# Altium PCB 2012_BALISE_CARTE_RECEPTEUR.PCBDOC
Units mm, origin at the board's own origin, x right, y up, seen from the top; angles counter-clockwise.
Board outline 60 x 60 mm, 4 copper layers (1-TOP, 2-Signal, 3-GND, 4-BOT); 112 components, 93 nets, 363 pads, 113 vias.
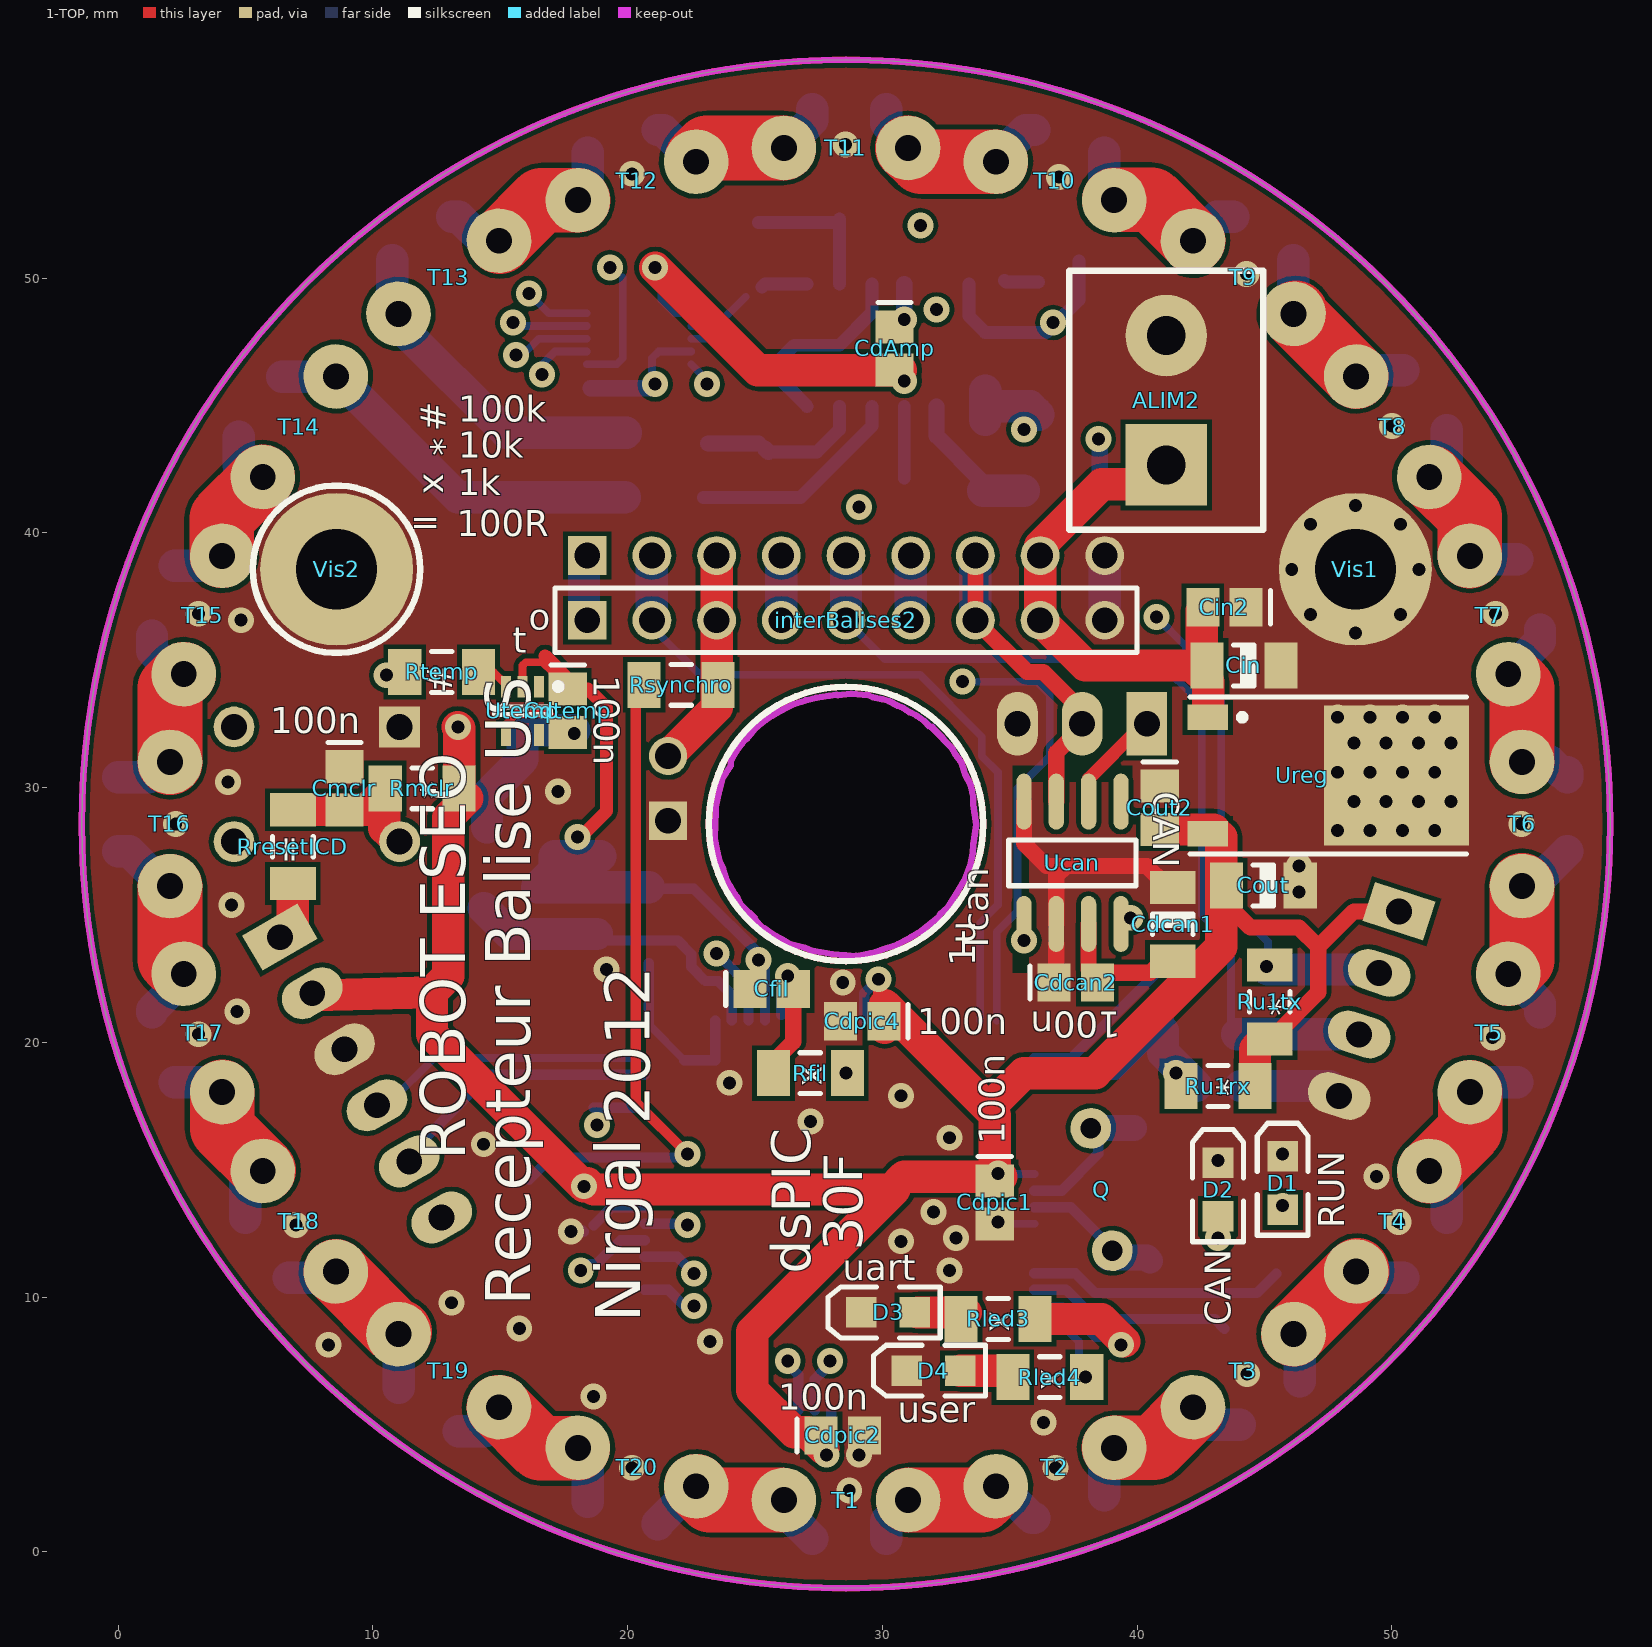
[diagram p0: 1-TOP view]
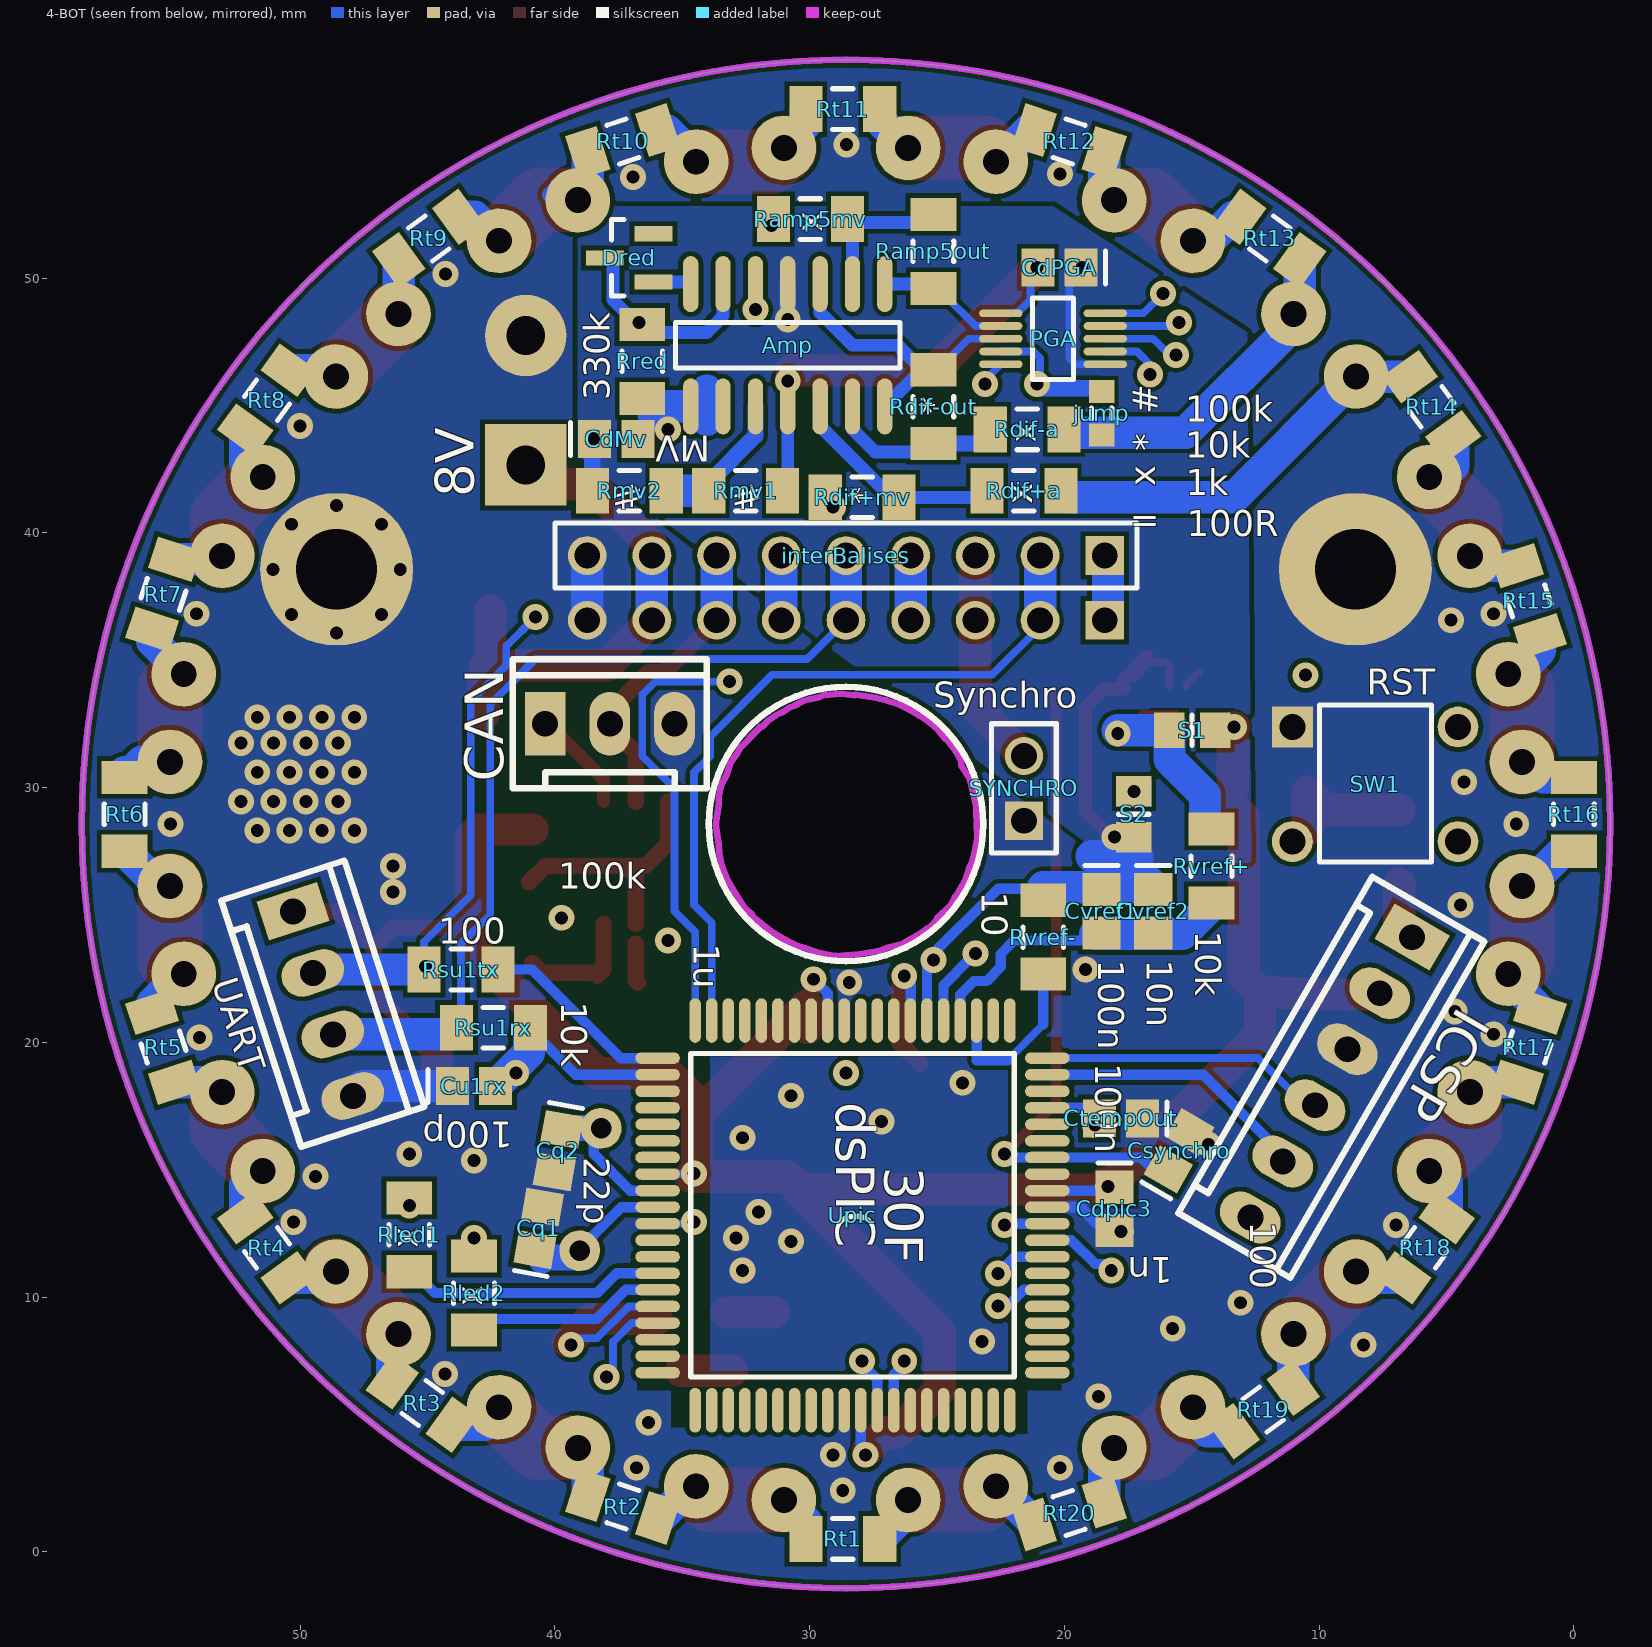
[diagram p1: 4-BOT view, seen from below]
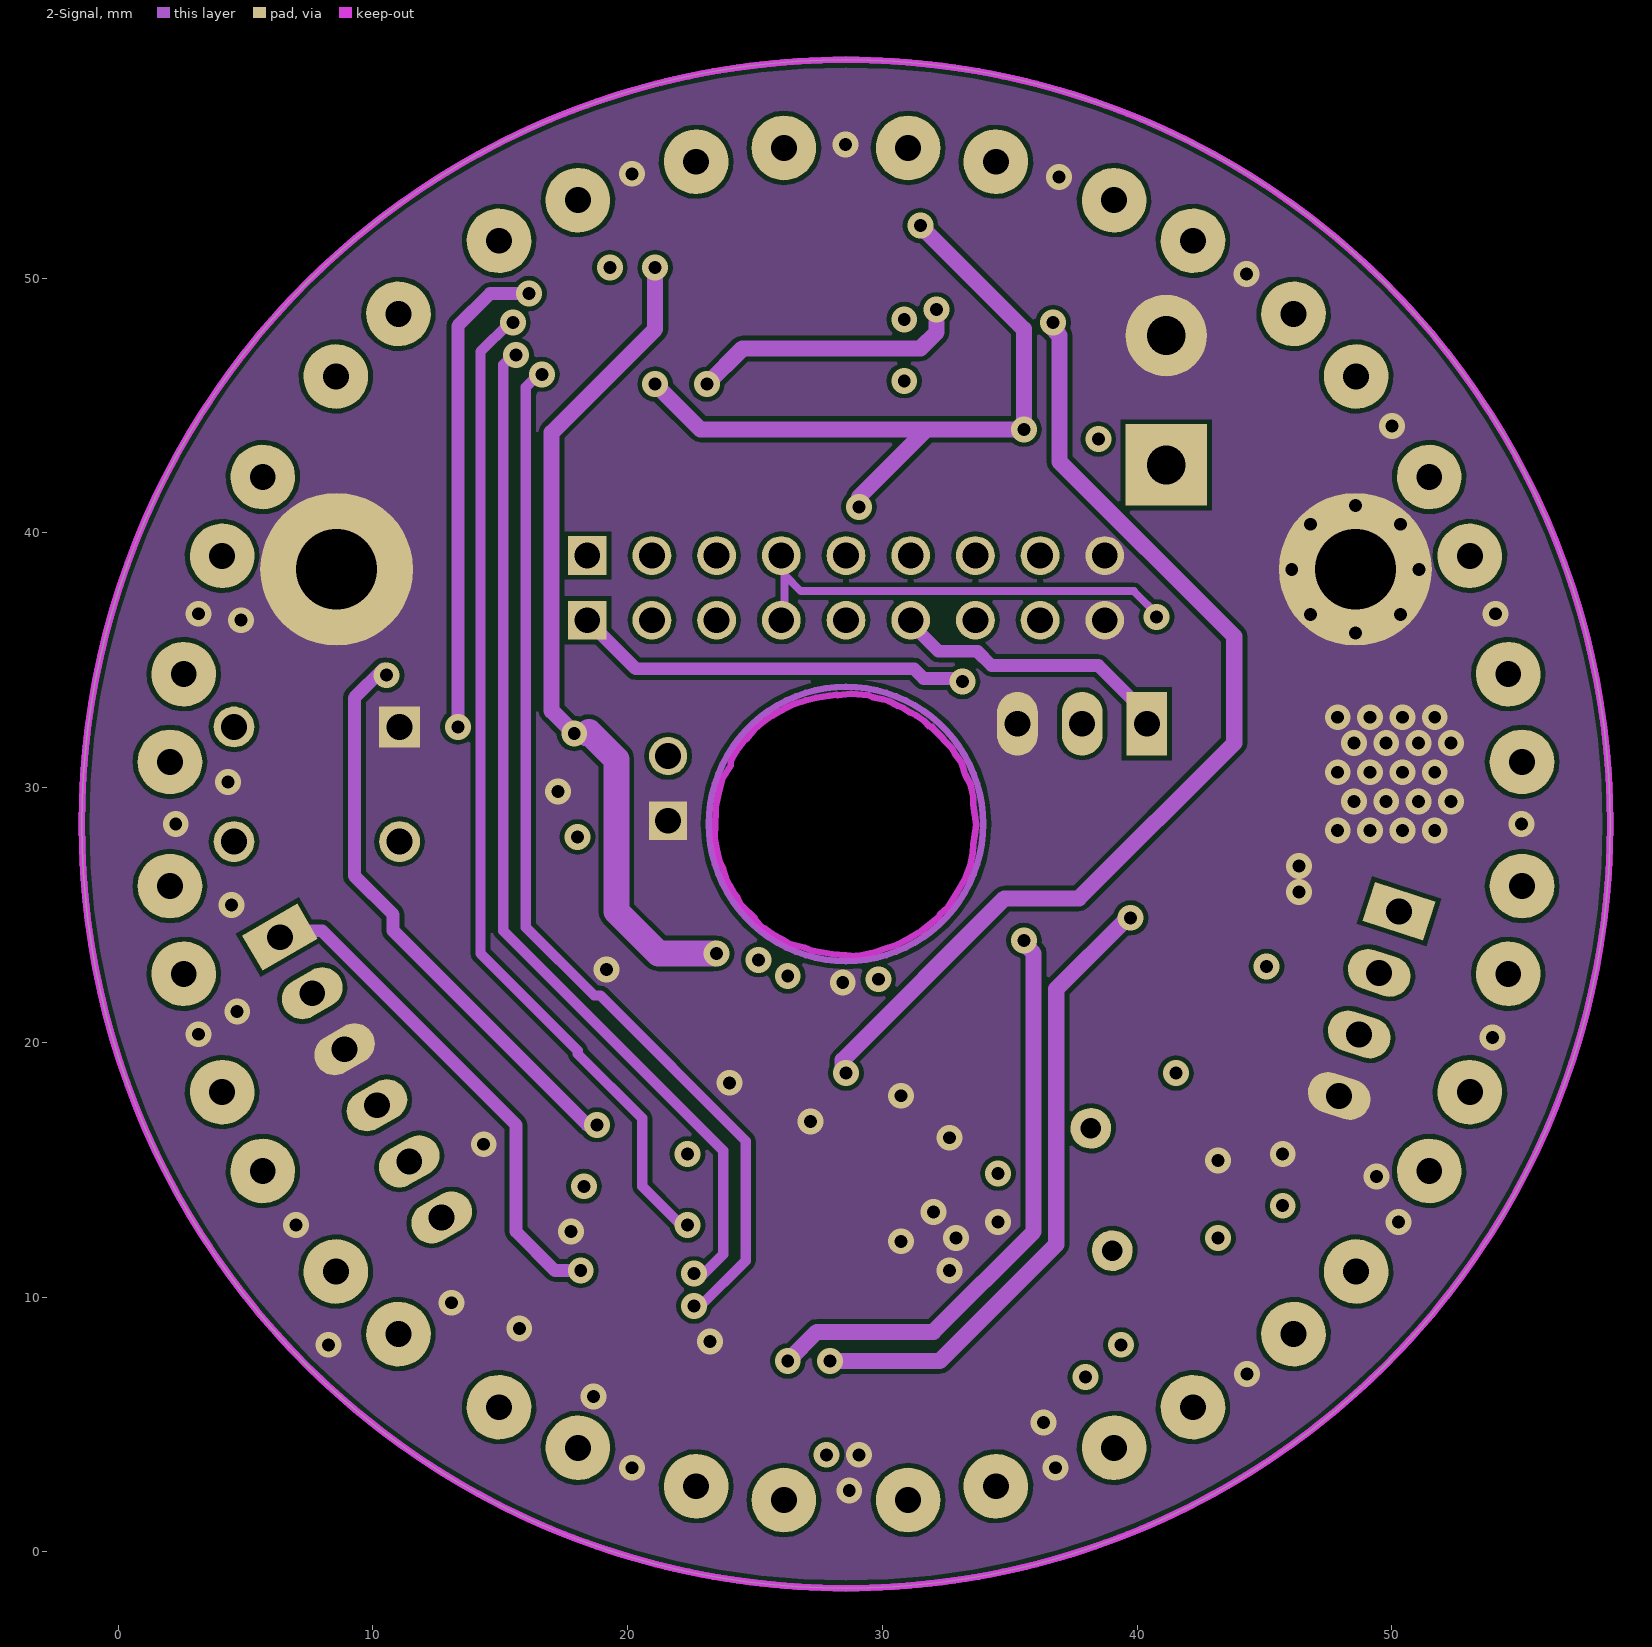
[diagram p2: 2-Signal]
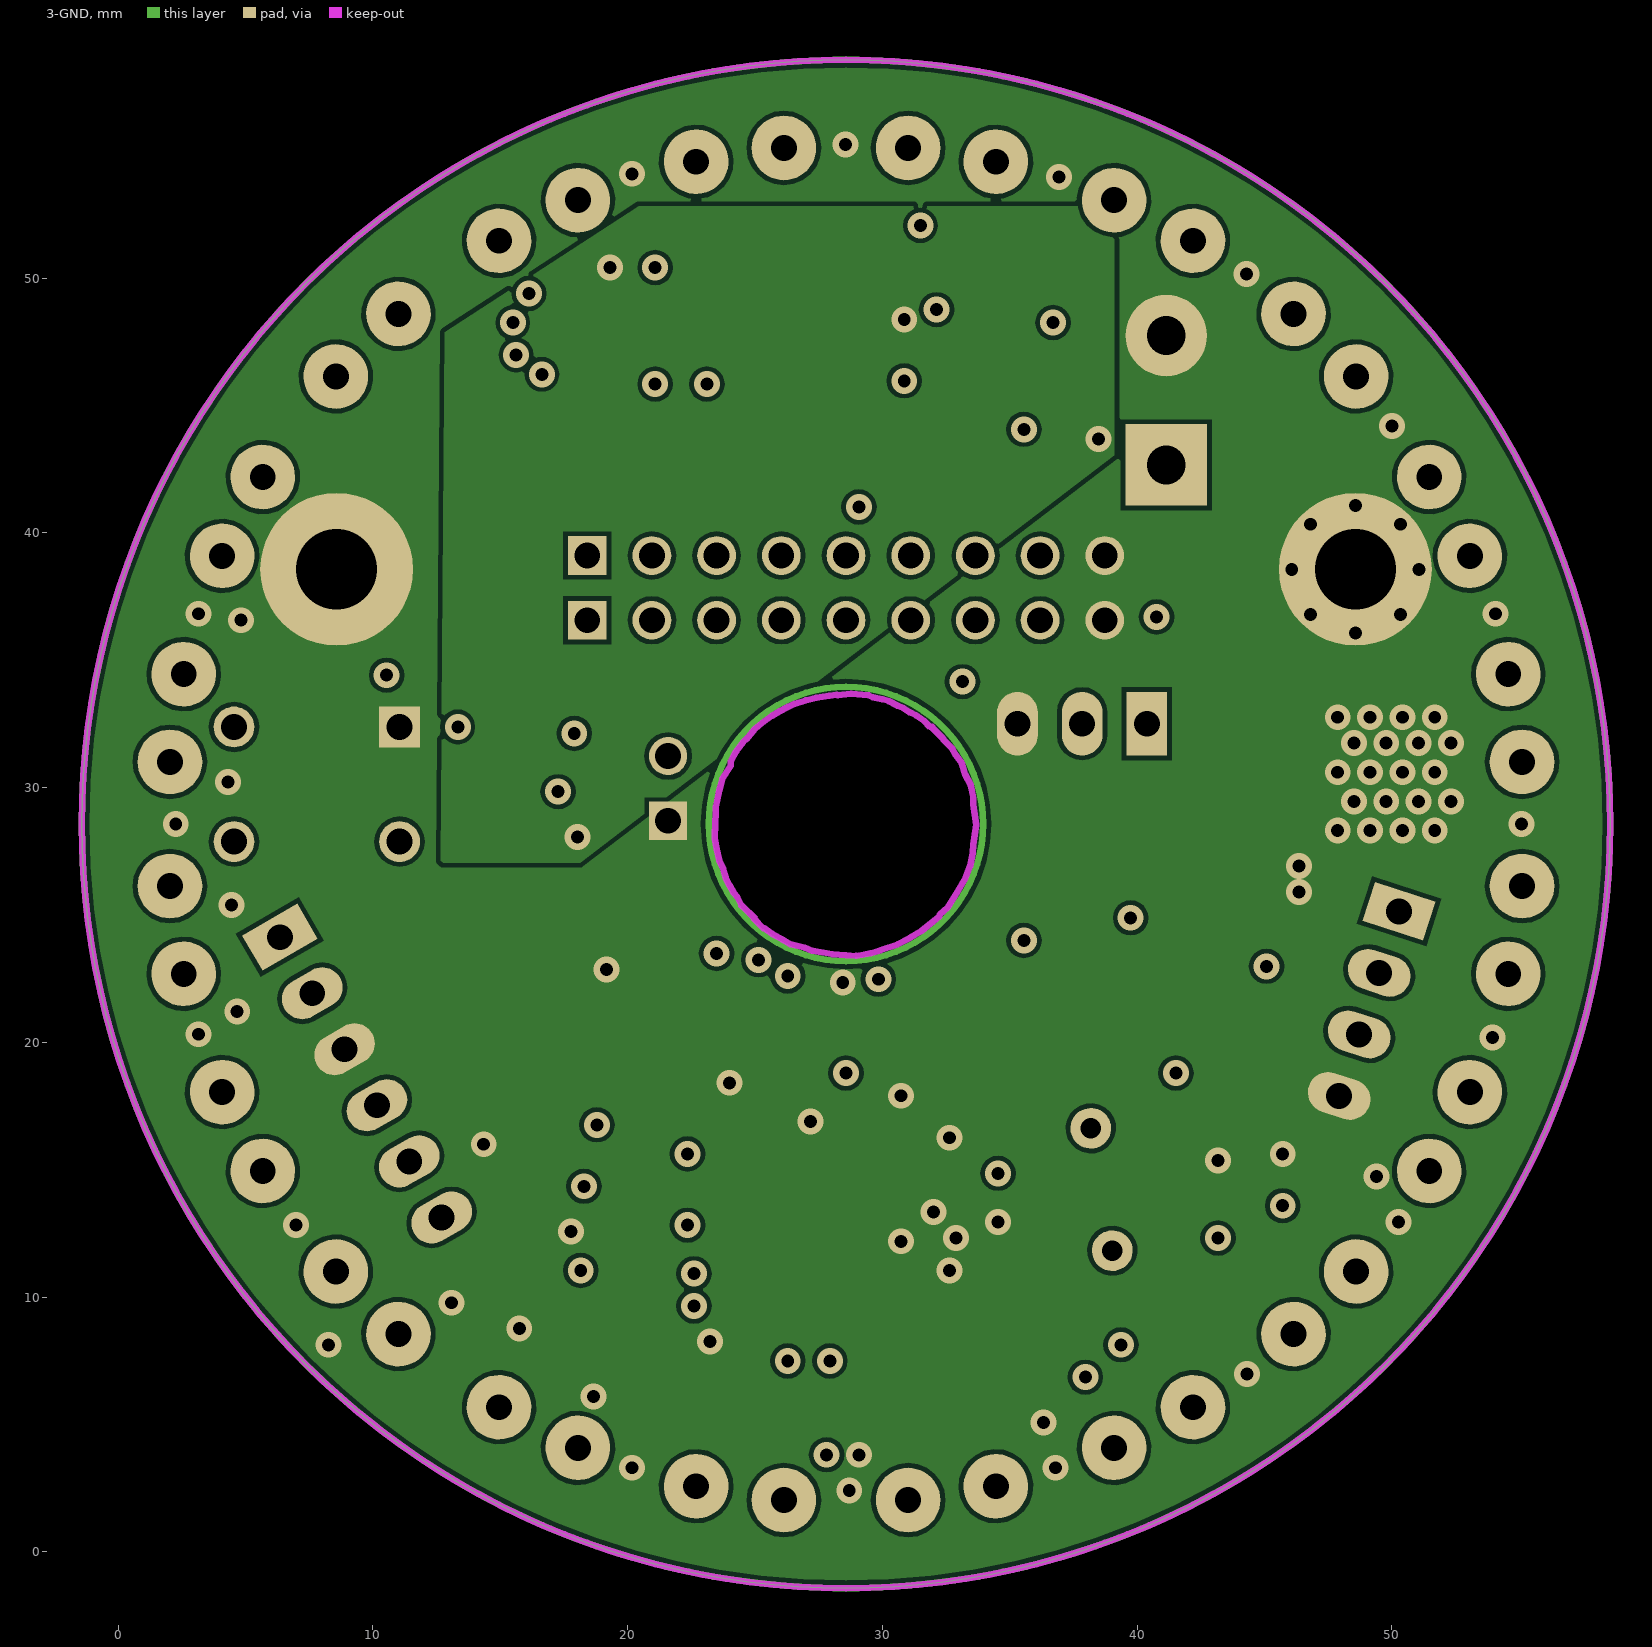
[diagram p3: 3-GND]
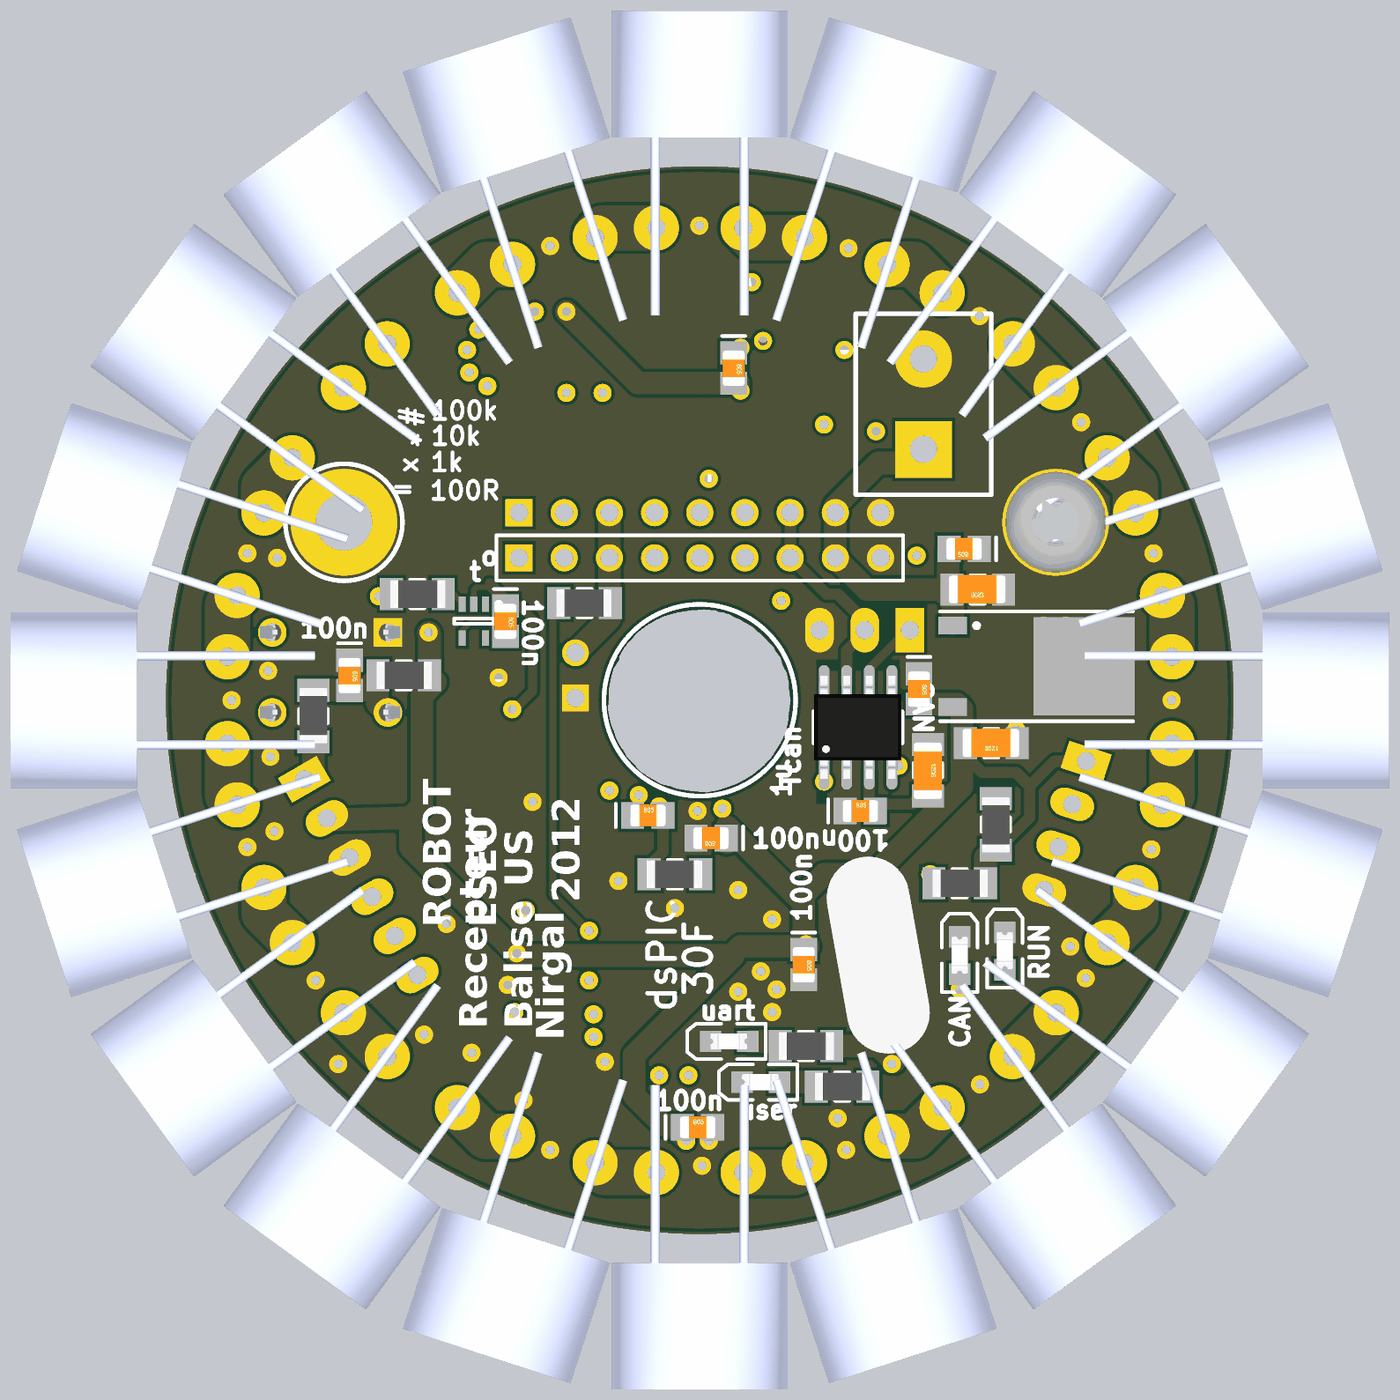
[diagram p4: 3D render of the assembled board from above, using the file's embedded part models]
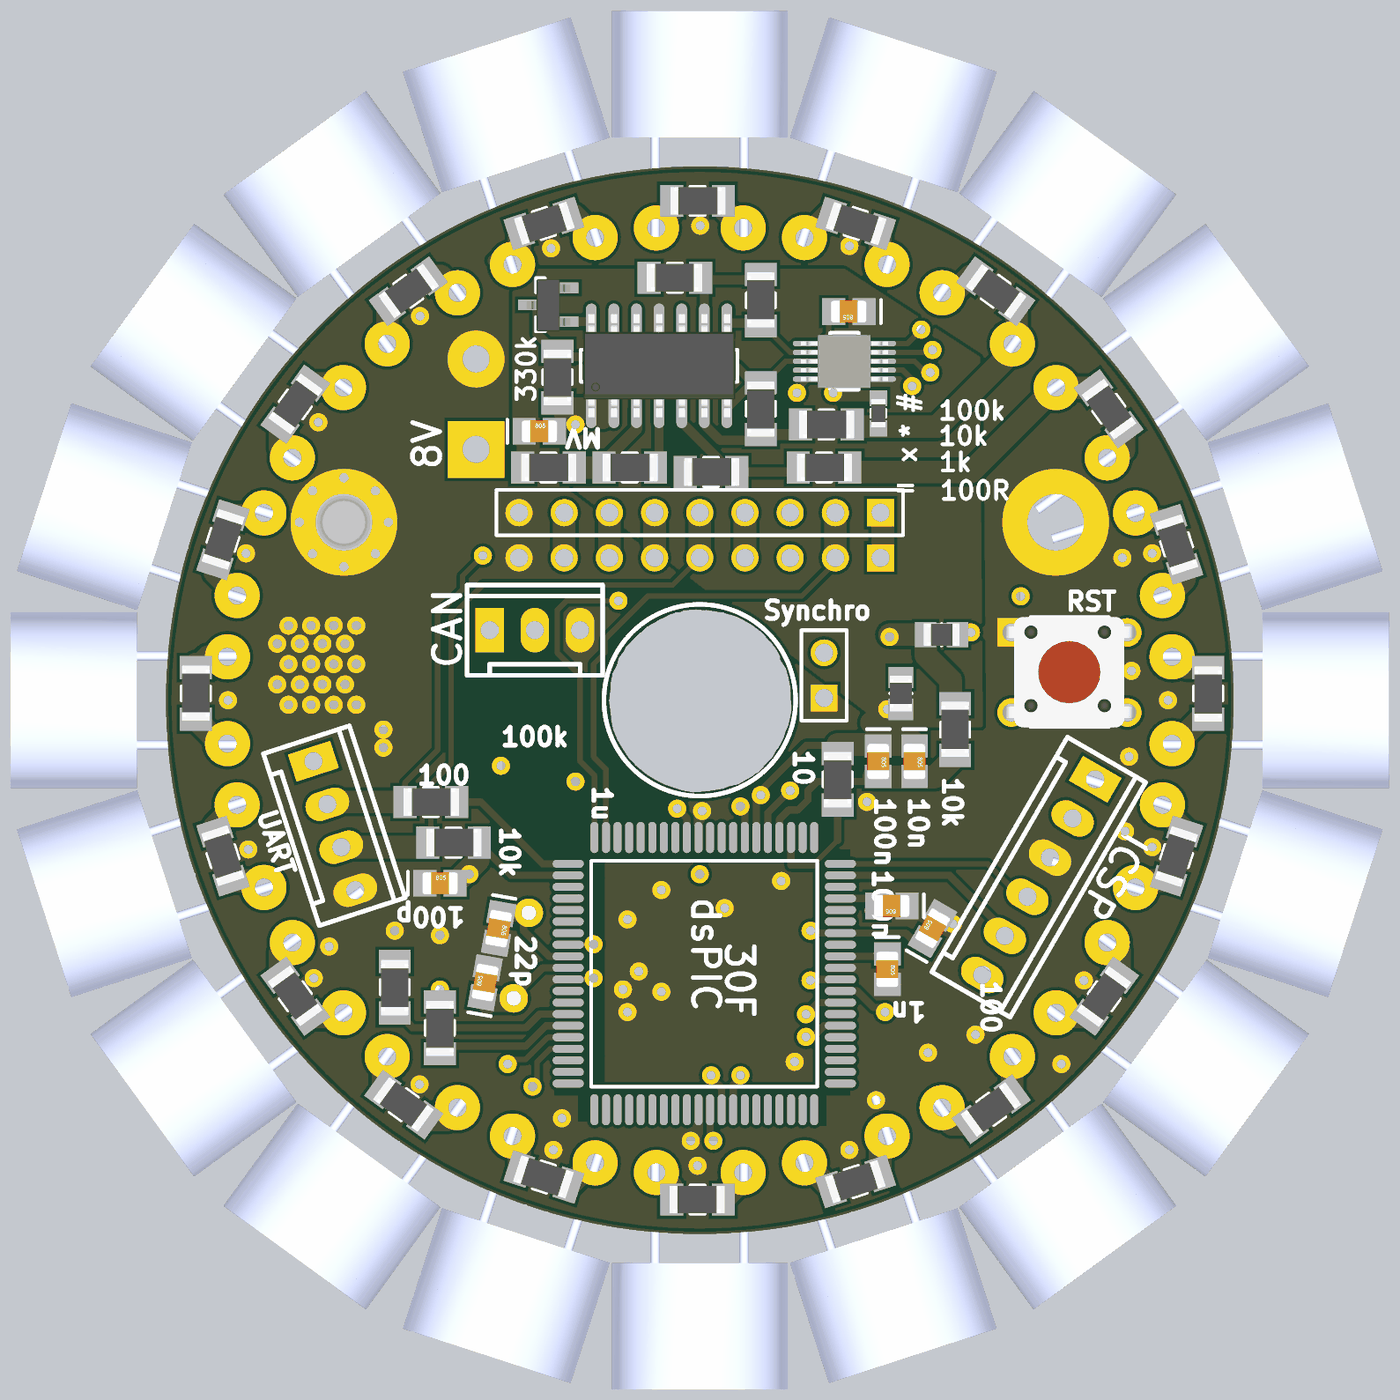
[diagram p5: 3D render of the assembled board from below, using the file's embedded part models]

## Layer stack, top to bottom
1-TOP: signal copper 0.0356
Dielectric: core 0.32, FR-4, Dk 4.8
2-Signal: signal copper 0.0356
Dielectric: prepreg 0.32, FR-4, Dk 4.8
3-GND: signal copper 0.0356
Dielectric: core 0.32, FR-4, Dk 4.8
4-BOT: signal copper 0.0356

## Board outline
-1.425,28.575 ccw(c28.575,28.575) 28.575,-1.425 ccw(c28.575,28.575) 58.575,28.575 ccw(c28.575,28.575) 28.575,58.575 ccw(c28.575,28.575)
cut-out: 24.257,31.42 24.054,31.039 24.054,30.861 23.724,30.353 23.597,29.896 23.47,29.261 23.444,28.346 23.419,28.321 23.419,27.991 23.495,27.584 23.597,27.153 23.749,26.822 23.851,26.467 24.003,26.162 24.181,25.857 24.308,25.705 24.46,25.4 24.46,25.375 24.486,25.375 25.019,24.841 24.968,24.841 25.324,24.486 25.375,24.486 25.679,24.257 26.06,24.054 26.391,23.851 26.949,23.724 27.254,23.597 28.042,23.47 28.575,23.419 28.981,23.393 29.54,23.495 29.947,23.622 30.607,23.851 31.09,24.105 31.547,24.384 32.233,24.943 32.258,25.019 32.563,25.298 32.969,25.933 33.223,26.365 33.452,26.924 33.553,27.432 33.579,27.762 33.68,28.55 33.579,29.337 33.579,29.591 33.477,30.099 33.249,30.531 33.122,30.963 32.842,31.344 32.741,31.547 32.385,31.902 32.385,31.928 31.953,32.36 31.953,32.385 31.877,32.385 31.623,32.639 31.318,32.842 31.064,32.969 30.836,33.122 30.582,33.223 30.251,33.401 29.997,33.477 29.616,33.553 29.464,33.63 28.778,33.68 28.245,33.63 28.219,33.655 27.915,33.604 27.407,33.528 27,33.426 26.568,33.299 26.289,33.172 25.959,32.995 25.654,32.817 25.273,32.537 24.994,32.309 24.663,31.902 24.638,31.902 24.536,31.801

## Design rules (kind name [scope] priority, off if disabled: settings)
Clearance [All] p1: gap=0.178
FabricationTestPointUsage TestPointUsage [All] p1: valid=0 allowmultiple=FALSE
FabricationTestpoint Testpoint [(IsPad And (OnTopLayer Or OnBottomLayer))] p1: side=3 testpointundercomponent=TRUE minsize=1.016 maxsize=2.54 preferedsize=1.524 minholesize=0 maxholesize=1.016 preferedholesize=0.813 testpointgrid=0.025 allowsidetop=TRUE allowsidebottom=TRUE usegrid=TRUE gridtolerance=0
PlaneConnect [All] p1: planeconnectstyle=Direct reliefexpansion=0.635 reliefentries=4 reliefconductorwidth=0.305 reliefairgap=0.381
PolygonConnect [All] p1: connectstyle=Direct reliefconductorwidth=0.254 reliefentries=4 polygonreliefangle="90 Angle"
RoomDefinition 2012_BALISE_CARTE_RECEPTEUR [InComponentClass('2012_BALISE_CARTE_RECEPTEUR')] p1: confinementstyle=ConfineIn formatcopy=TRUE lockcomponents=FALSE outline 59.731,0 66.843,0 66.843,9.652 59.731,9.652
RoutingLayers RoutingLayers_1 [All] p1: top layer_v5=TRUE mid layer 1_v5=FALSE mid layer 2_v5=FALSE bottom layer_v5=TRUE
RoutingLayers [All] p2: top layer_v5=TRUE mid layer 1_v5=FALSE mid layer 2_v5=FALSE bottom layer_v5=TRUE
RoutingVias [All] p1: holewidth=0.61 width=1.27 viastyle="Through Hole" minholewidth=0.61 minwidth=1.27 maxholewidth=0.61 maxwidth=1.27
SilkscreenOverComponentPads [All] p1: minsilkscreentomaskgap=0.254
SolderMaskExpansion [All] p1: expansion=0
Width ALIM [InNet('0') Or InNet('VDD')] p1: maxlimit=2.54 minlimit=0.254 preferedwidth=0.635
Width [All] p2: maxlimit=3.81 minlimit=0.127 preferedwidth=0.406
23 further rules are at their usual default settings.

## Components (designator, comment, footprint, x,y, rotation, side; value= is the part's Value field where it differs from the comment)
ALIM2 "ALIM2" BORNIER2 41.148,42.672 r90 top
Amp "MCP6024-I/SL" SO14_N 30.861,47.371 r90 bottom
CAN "BARRETTE3" HE14_3 40.386,32.512 r180 bottom
CdAmp "100nF" C0805_N 30.48,47.244 r270 top
Cdcan1 "1uF" C1206_N 41.402,24.638 r270 top
Cdcan2 "100nF" C0805_N 37.592,22.352 r0 top
CdMv "100nF" C0805_N 37.592,43.688 r180 bottom
CdPGA "100nF" C0805_N 20.193,50.419 r0 bottom
Cdpic1 "100nF" C0805_N 34.417,13.716 r270 top
Cdpic2 "100nF" C0805_N 28.448,4.572 r0 top
Cdpic3 "100nF" C0805_N 18.034,13.462 r270 bottom
Cdpic4 "100nF" C0805_N 29.21,20.828 r180 top
Cdtemp "100nF" C0805_N 17.653,33.02 r270 top
Cfil "1nF" C0805_N 25.654,22.098 r0 top
Cin "10uF" C1206_N 44.196,34.798 r180 top
Cin2 "10nF" C0805_N 43.434,37.084 r180 top
Cmclr "100nF" C0805_N 8.89,29.972 r270 top
Cout "10uF" C1206_N 44.958,26.162 r180 top
Cout2 "100nF" C0805_N 40.894,29.21 r270 top
Cq1 "22pF" C0805_N 40.64,12.7 r100 bottom
Cq2 "22pF" C0805_N 39.878,15.748 r280 bottom
Csynchro "1nF" C0805_N 15.494,15.748 r120 bottom
CtempOut "1uF" C0805_N 17.78,17.018 r0 bottom
Cu1rx "100pF" C0805_N 43.18,18.288 r180 bottom
Cvref1 "100nF" C0805_N 18.542,25.146 r270 bottom
Cvref2 "10nF" C0805_N 16.51,25.146 r270 bottom
D1 "LED" LED_0805 45.72,14.478 r90 top
D2 "LED" LED_0805 43.18,14.224 r90 top
D3 "LED" LED_0805 30.226,9.398 r180 top
D4 "LED" LED_0805 32.004,7.112 r180 top
Dred "Diode Shottky BAT54" SOT23-3N 37.084,50.8 r0 bottom
ICSP "BARRETTE6" HE14_6 6.35,24.13 r300 bottom
interBalises "Header 9" HDR1X9 18.415,39.116 r0 bottom locked
interBalises2 "Header 9" HDR1X9 18.415,36.576 r0 top locked
jump "0R" R0603_N 18.542,44.704 r270 bottom
PGA "PGA113" MSOP-UN10_N 20.447,47.625 r180 bottom
Q "QU" HC49US 38.608,14.224 r280 top
Ramp5mv "1k" R1206_N 29.972,52.324 r0 bottom
Ramp5out "4.7k" R1206_N 25.146,51.054 r90 bottom
Rdif+a "1k" R1206_N 21.59,41.656 r180 bottom
Rdif+mv "10k" R1206_N 27.94,41.402 r180 bottom
Rdif-a "1k" R1206_N 21.463,44.069 r180 bottom
Rdif-out "10k" R1206_N 25.146,44.958 r270 bottom
Rfil "1k" R1206_N 27.178,18.796 r180 top
Rled1 "1K" R1206_N 45.72,12.446 r270 bottom
Rled2 "1K" R1206_N 43.18,10.16 r270 bottom
Rled3 "1K" R1206_N 34.544,9.144 r0 top
Rled4 "1K" R1206_N 36.576,6.858 r0 top
Rmclr "10k" R1206_N 11.938,29.972 r0 top
Rmv1 "100k" R1206_N 32.512,41.656 r180 bottom
Rmv2 "100k" R1206_N 37.084,41.656 r180 bottom
Rred "330k" R1206_N 36.576,46.736 r270 bottom
RresetICD "100" R1206_N 6.858,27.686 r90 top
Rsu1rx "10k" R1206_N 42.418,20.574 r180 bottom
Rsu1tx "100" R1206_N 43.688,22.86 r180 bottom
Rsynchro "100" R1206_N 22.098,34.036 r180 top
Rt1 "4.7k" R1206_N 28.702,0.508 r0 bottom
Rt2 "4.7k" R1206_N 37.338,1.778 r18 bottom
Rt3 "4.7k" R1206_N 45.212,5.842 r36 bottom
Rt4 "4.7k" R1206_N 51.308,11.938 r54 bottom
Rt5 "4.7k" R1206_N 55.372,19.812 r72 bottom
Rt6 "4.7k" R1206_N 56.896,28.956 r90 bottom
Rt7 "4.7k" R1206_N 55.372,37.592 r108 bottom
Rt8 "4.7k" R1206_N 51.308,45.212 r126 bottom
Rt9 "4.7k" R1206_N 44.958,51.562 r144 bottom
Rt10 "4.7k" R1206_N 37.338,55.372 r162 bottom
Rt11 "4.7k" R1206_N 28.702,56.642 r180 bottom
Rt12 "4.7k" R1206_N 19.812,55.372 r198 bottom
Rt13 "4.7k" R1206_N 11.938,51.562 r216 bottom
Rt14 "4.7k" R1206_N 5.588,44.958 r234 bottom
Rt15 "4.7k" R1206_N 1.778,37.338 r252 bottom
Rt16 "4.7k" R1206_N 0,28.956 r270 bottom
Rt17 "4.7k" R1206_N 1.778,19.812 r288 bottom
Rt18 "4.7k" R1206_N 5.842,11.938 r306 bottom
Rt19 "4.7k" R1206_N 12.192,5.588 r324 bottom
Rt20 "4.7k" R1206_N 19.812,1.524 r342 bottom
Rtemp "100k" R1206_N 12.7,34.544 r0 top
Ru1rx "10k" R1206_N 43.18,18.288 r0 top
Ru1tx "10k" R1206_N 45.212,21.59 r270 top
Rvref+ "10k" R1206_N 14.224,26.924 r90 bottom
Rvref- "10" R1206_N 20.828,24.13 r270 bottom
S1 "Strap" R0805_N 14.986,32.258 r0 bottom
S2 "Strap" R0805_N 17.272,28.956 r270 bottom
SW1 "SW_Pushbutton_6x6mm_Vertical" "Switch 6x6 Vertical" 11.049,32.385 r180 bottom
SYNCHRO "SYNCHRO" HEADER2 21.59,28.702 r90 bottom
T1 "40kHz" "MA40S4R/S Transducteur US - 3D_mi_carte" 28.575,2.032 r180 top locked
T2 "40kHz" "MA40S4R/S Transducteur US - 3D_mi_carte" 36.779,3.327 r198 top locked
T3 "40kHz" "MA40S4R/S Transducteur US - 3D_mi_carte" 44.171,7.112 r216 top locked
T4 "40kHz" "MA40S4R/S Transducteur US - 3D_mi_carte" 50.038,12.979 r234 top locked
T5 "40kHz" "MA40S4R/S Transducteur US - 3D_mi_carte" 53.823,20.371 r252 top locked
T6 "40kHz" "MA40S4R/S Transducteur US - 3D_mi_carte" 55.118,28.575 r270 top locked
T7 "40kHz" "MA40S4R/S Transducteur US - 3D_mi_carte" 53.823,36.779 r288 top locked
T8 "40kHz" "MA40S4R/S Transducteur US - 3D_mi_carte" 50.038,44.171 r306 top locked
T9 "40kHz" "MA40S4R/S Transducteur US - 3D_mi_carte" 44.171,50.038 r324 top locked
T10 "40kHz" "MA40S4R/S Transducteur US - 3D_mi_carte" 36.779,53.823 r342 top locked
T11 "40kHz" "MA40S4R/S Transducteur US - 3D_mi_carte" 28.575,55.118 r0 top locked
T12 "40kHz" "MA40S4R/S Transducteur US - 3D_mi_carte" 20.371,53.823 r18 top locked
T13 "40kHz" "MA40S4R/S Transducteur US - 3D_mi_carte" 12.979,50.038 r36 top locked
T14 "40kHz" "MA40S4R/S Transducteur US - 3D_mi_carte" 7.112,44.171 r54 top locked
T15 "40kHz" "MA40S4R/S Transducteur US - 3D_mi_carte" 3.327,36.779 r72 top locked
T16 "40kHz" "MA40S4R/S Transducteur US - 3D_mi_carte" 2.032,28.575 r90 top locked
T17 "40kHz" "MA40S4R/S Transducteur US - 3D_mi_carte" 3.327,20.371 r108 top locked
T18 "40kHz" "MA40S4R/S Transducteur US - 3D_mi_carte" 7.112,12.979 r126 top locked
T19 "40kHz" "MA40S4R/S Transducteur US - 3D_mi_carte" 12.979,7.112 r144 top locked
T20 "40kHz" "MA40S4R/S Transducteur US - 3D_mi_carte" 20.371,3.327 r162 top locked
UART "BARRETTE4" HE14_4 50.292,25.146 r252 bottom
Ucan "MCP2551" SO8_N 37.465,27.051 r90 top
Upic "dsPIC30F6010A" TQFP80_N 28.321,13.208 r0 bottom locked
Ureg "MC7805BDTG" 369A-13 46.482,30.48 r270 top
Utemp "MCP9701AT-E/LT" SC70-LT5_N 15.875,33.02 r270 top
Vis1 "Pad_M3" M3x6mm#1 48.575,38.575 r0 top
Vis2 "Pad_M3" M3x6mm#2 8.575,38.575 r0 top

## Footprints (in the part's own frame and the unit in brackets; to place one, negate y for a bottom-side part, rotate by r counter-clockwise, add the part's x,y. Pads: shape width x height; smd on the part's side, far side on the other; paste and mask are expansions set on the pad)
369A-13 [mm] "D-PAK/TO-252-AA; 3 Leads (1 Cropped); Body 10.3 (inc. leads) x 6.7 mm (LxW max)"
  rect 1x1.6 smd: 1(-2.285,-3.7) 3(2.285,-3.7)
  rect 5.5x5.7 smd: 4(0,3.7)
  silkscreen extent -3.09,-4.4 3.09,6.45
BORNIER2 [mm] "Connector; Header; 2 Position; screw terminal blocks, Pin Spacing=5.08mm"
  rect 3.2x3.2 hole 1.524: 1(0,0)
  round 3.2 hole 1.524: 2(5.08,0)
  silkscreen extent -2.54,-3.81 7.62,3.81
C0805_N [mm] "Chip Capacitor, Body 2.0x1.3mm, IPC Medium Density"
  rect 1.3x1.5 smd: 1(-0.85,0) 2(0.85,0)
  silkscreen extent -1.8,-0.65 -1.8,0.65, body extent -0.99,-0.63 1.01,0.63, height 0.8
C1206_N [mm] "Chip Capacitor, Body 3.2x1.6mm, IPC Medium Density"
  rect 1.3x1.8 smd: 1(-1.45,0) 2(1.45,0)
  silkscreen extent -0.4,-0.8 0.4,0.8, body extent -1.57,-0.81 1.63,0.79, height 1.02
HC49US [mil] "Quartz Crystal, HC49 Bas profil, Pas 4,88mm"
  round 63 hole 32: 1(-96.06,0) 2(96.06,0)
  body extent -236,-150 233,150, height 143
HDR1X9 [mil] "Connector; Header; 9 Position"
  rect 60x60 hole 40: 1(0,0)
  round 60 hole 40: 2(100,0) 3(200,0) 4(300,0) 5(400,0) 6(500,0) 7(600,0) 8(700,0) 9(800,0)
  silkscreen extent -50,-50 850,50
HE14_3 [mm] "Connector; HE14; 3 Position; Pin Spacing=2.54mm"
  rect 1.6x2.5 hole 1.016: 1(0,0)
  oval 1.6x2.5 hole 1.016: 2(2.54,0) 3(5.08,0)
  silkscreen extent -1.27,-2.54 6.35,2.54
HE14_4 [mm] "Connector; HE14; 4 Position; Pin Spacing=2.54mm"
  rect 1.6x2.5 hole 1.016: 1(0,0)
  oval 1.6x2.5 hole 1.016: 2(2.54,0) 3(5.08,0) 4(7.62,0)
  silkscreen extent -1.27,-2.54 8.89,2.54
HE14_6 [mm] "Connector; HE14; 6 Position; Pin Spacing=2.54mm"
  rect 1.6x2.5 hole 1.016: 1(0,0)
  oval 1.6x2.5 hole 1.016: 2(2.54,0) 3(5.08,0) 4(7.62,0) 5(10.16,0) 6(12.7,0)
  silkscreen extent -1.27,-2.54 13.97,2.54
HEADER2 [mm] "Connector; Header; 2 Position"
  rect 1.5x1.5 hole 1.016: 1(0,0)
  round 1.5 hole 1.016: 2(2.54,0)
  silkscreen extent -1.27,-1.27 3.81,1.27
LED_0805 [mm] "SM LED; 2 Flat Leads"
  rect 1.2x1.2 smd: 1(-1.05,0) 2(1.05,0)
  silkscreen extent -2.05,-1 2.35,1, body extent -1.05,-0.64 1.06,0.64, height 1.2
M3x6mm#1 [mm] "Vis M3 X 6mm _TORX_Tête 6mm"
  round 0.8 hole 0.508: 1(-2.5,0) 1(-1.768,-1.768) 1(-1.768,1.768) 1(0,-2.5) 1(0,2.5) 1(1.768,-1.768) 1(1.768,1.768) 1(2.5,0)
  round 6 hole 3.175: 1(0,0)
  body extent -2.84,-2.85 2.86,2.85, height 1.67
M3x6mm#2 [mm] "Vis M3 X 6mm"
  round 6 hole 3.175: 1(0,0)
  silkscreen extent -3.29,-3.28 3.29,3.28
"MA40S4R/S Transducteur US - 3D_mi_carte" [mm]
  round 2.54 hole 1.016: 1(-2.44,0) 2(2.44,0)
  body extent -4.95,-4.91 4.95,12.19, height 5.36
MSOP-UN10_N [mm] "TSSOP, 10-Leads, Body 3x3mm, Pitch 0.5mm, IPC Medium Density"
  oval 1.7x0.3 smd: 1(-2.05,1) 2(-2.05,0.5) 3(-2.05,0) 4(-2.05,-0.5) 5(-2.05,-1) 6(2.05,-1) 7(2.05,-0.5) 8(2.05,0) 9(2.05,0.5) 10(2.05,1)
  silkscreen extent -0.8,-1.6 0.8,1.6, body extent -2.45,-1.5 2.45,1.5, height 1.01
R0603_N [mm] "Chip Resistor, Body 1.6x0.8mm, IPC Medium Density"
  rect 0.9x1 smd: 1(-0.85,0) 2(0.85,0)
  silkscreen extent -0.2,-0.4 0.2,0.4, body extent -0.85,-0.48 0.85,0.48, height 0.6
R0805_N [mm] "Chip Resistor, Body 2.0x1.3mm, IPC Medium Density"
  rect 1.2x1.4 smd: 1(-0.9,0) 2(0.9,0)
  silkscreen extent 0,-0.6 0,0.6, body extent -1.07,-0.7 1.07,0.7, height 0.65
R1206_N [mm] "Chip Resistor, Body 3.2x1.6mm, IPC Medium Density"
  rect 1.3x1.8 smd: 1(-1.45,0) 2(1.45,0)
  silkscreen extent -0.4,-0.8 0.4,0.8, body extent -1.68,-0.87 1.68,0.87, height 0.71
SC70-LT5_N [mm] "SOT353, 5-Leads, Body 2x1.3mm, Pitch 0.65mm, Lead Span 2.1mm, IPC Medium Density"
  rect 0.85x0.4 smd: 1(-0.95,0.65) 2(-0.95,0) 3(-0.95,-0.65) 4(0.95,-0.65) 5(0.95,0.65)
  silkscreen extent -1.07,-1.1 0.15,1.53, body extent -0.7,-1.1 0.7,1.1, height 1.1
SO8_N [mm] "8-Pin Small Outline Integrated Circuit 1.27 mm Pitch, IPC Medium Density"
  oval 2.2x0.6 smd: 1(-2.4,1.905) 2(-2.4,0.635) 3(-2.4,-0.635) 4(-2.4,-1.905) 5(2.4,-1.905) 6(2.4,-0.635) 7(2.4,0.635) 8(2.4,1.905)
  silkscreen extent -0.9,-2.5 0.9,2.5, body extent -2.89,-2.45 2.89,2.46, height 1.75
SO14_N [mm] "14-Pin Small Outline Integrated Circuit 1.27 mm Pitch, IPC Medium Density"
  oval 2.2x0.6 smd: 1(-2.4,3.81) 2(-2.4,2.54) 3(-2.4,1.27) 4(-2.4,0) 5(-2.4,-1.27) 6(-2.4,-2.54) 7(-2.4,-3.81) 8(2.4,-3.81) 9(2.4,-2.54) 10(2.4,-1.27) 11(2.4,0) 12(2.4,1.27) 13(2.4,2.54) 14(2.4,3.81)
  silkscreen extent -0.9,-4.4 0.9,4.4, body extent -2.9,-4.33 2.9,4.33, height 1.75
SOT23-3N [mm] "SOT23, 3-Leads, Body 2.9x1.3mm, Pitch 0.95mm, Lead Span 2.5mm, IPC Medium Density"
  rect 1.5x0.6 smd: 1(-0.95,0.95) 2(-0.95,-0.95) 3(0.95,0)
  silkscreen extent 0.2,-1.5 0.7,1.5, body extent -1.24,-1.5 1.23,1.5, height 1.1
"Switch 6x6 Vertical" [mm]
  rect 1.6x1.6 hole 1.016: 1(0,0)
  round 1.6 hole 1.016: 2(6.5,0) 3(0,-4.5) 4(6.5,-4.5)
  silkscreen extent 1.07,-5.31 5.46,0.86, body extent -0.71,-5.34 7.19,0.86, height 7
TQFP80_N [mm] "80-Pin Thin Plastic Quad Flat Pack 0.65 mm Pitch, IPC Medium Density"
  oval 1.75x0.45 smd: 1(-7.65,6.175) 2(-7.65,5.525) 3(-7.65,4.875) 4(-7.65,4.225) 5(-7.65,3.575) 6(-7.65,2.925) 7(-7.65,2.275) 8(-7.65,1.625) 9(-7.65,0.975) 10(-7.65,0.325) 11(-7.65,-0.325) 12(-7.65,-0.975) 13(-7.65,-1.625) 14(-7.65,-2.275) 15(-7.65,-2.925) 16(-7.65,-3.575) 17(-7.65,-4.225) 18(-7.65,-4.875) 19(-7.65,-5.525) 20(-7.65,-6.175) 41(7.65,-6.175) 42(7.65,-5.525) 43(7.65,-4.875) 44(7.65,-4.225) 45(7.65,-3.575) 46(7.65,-2.925) 47(7.65,-2.275) 48(7.65,-1.625) 49(7.65,-0.975) 50(7.65,-0.325) 51(7.65,0.325) 52(7.65,0.975) 53(7.65,1.625) 54(7.65,2.275) 55(7.65,2.925) 56(7.65,3.575) 57(7.65,4.225) 58(7.65,4.875) 59(7.65,5.525) 60(7.65,6.175)
  oval 0.45x1.75 smd: 21(-6.175,-7.65) 22(-5.525,-7.65) 23(-4.875,-7.65) 24(-4.225,-7.65) 25(-3.575,-7.65) 26(-2.925,-7.65) 27(-2.275,-7.65) 28(-1.625,-7.65) 29(-0.975,-7.65) 30(-0.325,-7.65) 31(0.325,-7.65) 32(0.975,-7.65) 33(1.625,-7.65) 34(2.275,-7.65) 35(2.925,-7.65) 36(3.575,-7.65) 37(4.225,-7.65) 38(4.875,-7.65) 39(5.525,-7.65) 40(6.175,-7.65) 61(6.175,7.65) 62(5.525,7.65) 63(4.875,7.65) 64(4.225,7.65) 65(3.575,7.65) 66(2.925,7.65) 67(2.275,7.65) 68(1.625,7.65) 69(0.975,7.65) 70(0.325,7.65) 71(-0.325,7.65) 72(-0.975,7.65) 73(-1.625,7.65) 74(-2.275,7.65) 75(-2.925,7.65) 76(-3.575,7.65) 77(-4.225,7.65) 78(-4.875,7.65) 79(-5.525,7.65) 80(-6.175,7.65)
  silkscreen extent -6.35,-6.35 6.35,6.35, body extent -7,-7 7,7, height 1.6

## Part data
ALIM2: library part BORNIER2
Amp: "Rail-to-Rail Input/Output, 10 MHz Operational Amplifier, 14-Pin SOIC, Industrial Temperature"
CAN: "Header, 3-Pin"
CdAmp Cdcan1 Cdcan2 CdMv CdPGA Cdpic1 Cdpic2 Cdpic3 Cdpic4 Cdtemp Cfil Cin Cin2 Cmclr Cout Cout2 Cq1 Cq2 Csynchro CtempOut Cu1rx Cvref1 Cvref2: library part Capacitor, "Capacitor"
D1 D2 D3 D4: "Typical LED"
Dred: "DIODE, SCHOTTKY, SOT-23"
ICSP: "Header, 6-Pin"
interBalises interBalises2: "Header, 9-Pin"
jump Ramp5mv Ramp5out Rdif+a Rdif+mv Rdif-a Rdif-out Rfil Rled1 Rled2 Rled3 Rled4 Rmclr Rmv1 Rmv2 Rred RresetICD Rsu1rx Rsu1tx Rsynchro Rt1 Rt2 Rt3 Rt4 Rt5 Rt6 Rt7 Rt8 Rt9 Rt10 Rt11 Rt12 Rt13 Rt14 Rt15 Rt16 Rt17 Rt18 Rt19 Rt20 Rtemp Ru1rx Ru1tx Rvref+ Rvref-: library part Resistor, "Resistor"
PGA: "Programmable Gain Amplifier"
Q: library part QUARTZ_DROIT_BAS_PROFIL, "Crystal Oscillator"
S1 S2: library part Fusible_SMD, "Fuse"
SW1: "Switch tactil 6mm x 6mm Vertical"
SYNCHRO: library part BARRETTE2, "Header, 2-Pin"
T1 T2 T3 T4 T5 T6 T7 T8 T9 T10 T11 T12 T13 T14 T15 T16 T17 T18 T19 T20: library part Condensateur, "Capacitor"
UART: "Header, 4-Pin"
Ucan: "High Speed Can Transceiver"
Upic: "High-Performance, 16-bit Digital Signal Controllers"
Ureg: library part MC7805ACD2T, "Three-Terminal Positive Voltage Regulator"
Utemp: "Low-Power Linear Active Thermistor IC, 5-Pin SC-70, Extended Temperature, Tape and Reel"
Vis1 Vis2: library part "Vis M3 X 6mm _TORX_Tête 6mm", "Vis M3 X 6mm _TORX_Tête 6mm"

## Free pads (board coordinates)
  round 1.524 on Mech15: 0(28.575,28.575)

## Via types
v1: diameter 1.016, hole 0.508, 1-TOP to 4-BOT, 113 vias

## Nets (pads, with @x,y where several pads share a name; then routed paths per layer and width w, separated by ;. In a path a pad name is that pad's centre, name@x,y a point inside that pad or via, vN(x,y) a via of type N, cw(c..) or ccw(c..) an arc to the next point about the centre after c; other vN are vias at no path point)
AGND: Amp.11 CdAmp.1 CdMv.1 CdPGA.1 Cdtemp.1 Cfil.1 Cvref1.1 Cvref2.1 PGA.6 Rmv2.1 Rvref-.1 S2.2 Upic.26 Utemp.2 | length 35
  1-TOP w0.305: Utemp.2 15.875,34.798 16.002,34.925 16.662,34.925 17.055,34.532 17.055,34.507 Cdtemp.1@17.272,34.29
  1-TOP w0.508: 16.764,35.179 17.653,34.29 Cdtemp.1 18.454,33.87 19.177,33.147 19.177,29.083 v1@18.161,28.067
  4-BOT w0.305: PGA.6 19.574,46.625 19.812,46.863 CdPGA.1@19.812,50.038
  4-BOT w0.406: Rvref-.1@21.082,26.035 22.606,26.035 25.396,23.245 Upic.26
  4-BOT w0.635: v1(30.861,48.387) Amp.11 ; Rmv2.1 CdMv.1@38.534,43.508
  4-BOT w1.27: 18.923,27.305 17.145,27.305 17.145,26.776 16.457,26.088 Rvref-.1@20.828,26.088
  other v1: 25.146,23.241 18.034,28.067 38.481,43.688 19.304,50.419
AVDD: Amp.4 CdAmp.2 CdPGA.2 Cdtemp.2 PGA.1 Rmv1.2 Rvref+.2 S1.2 Upic.25 Utemp.4 | length 62.2
  1-TOP w0.305: Utemp.4@15.24,32.004 15.24,32.512 15.621,32.893 16.76,32.893 16.763,32.89 16.933,32.89 Cdtemp.2
  1-TOP w1.27: v1(21.082,50.419) 25.107,46.394 CdAmp.2 CdAmp.2@30.734,46.394
  2-Signal w0.635: v1(17.907,32.131) 17.018,33.02 17.018,43.942 21.082,48.006 v1(21.082,50.419)
  2-Signal w1.016: 18.415,32.131 18.479,32.194 19.558,31.115 19.558,25.146 21.209,23.495 v1@23.368,23.495
  4-BOT w0.305: CdPGA.2@21.336,50.292 21.336,49.149 21.86,48.625 PGA.1
  4-BOT w0.406: v1@23.368,23.495 23.749,23.495 23.749,23.241 24.746,22.244 Upic.25
  4-BOT w0.508: Rmv1.2@30.861,42.164 Amp.4
  4-BOT w1.27: Rvref+.2@14.478,28.448 14.478,29.718 15.875,31.115 S1.2@15.875,32.131 ; S1.2 v1@17.907,32.258
  other v1: 23.495,23.495 30.861,45.974
C1RX: Ucan.4 Upic.72 | length 26.6
  2-Signal w0.635: v1(27.94,7.493) 32.258,7.493 36.83,12.065 36.83,22.098 v1@39.497,24.765
  4-BOT w0.406: Upic.72 27.346,6.772 v1@27.94,7.366
  other v1: 39.751,24.892
C1TX: Ucan.1 Upic.73 | length 25.3
  2-Signal w0.635: v1(26.289,7.493) 27.432,8.636 32.004,8.636 35.941,12.573 35.941,23.495 35.56,23.876 v1(35.56,24.003)
  4-BOT w0.406: v1@26.289,7.366 26.696,6.959 Upic.73
CAN_H: CAN.2 interBalises2.7 interBalises.7 Ucan.7 | length 13.9
  1-TOP w0.635: interBalises.7@33.655,38.735 interBalises2.7 35.687,34.544 36.322,34.544 CAN.2@37.973,32.893 ; Ucan.7 36.83,31.369 CAN.2@38.1,32.639
  4-BOT w1.27: interBalises2.7 interBalises.7@33.655,38.735
CAN_L: CAN.1 interBalises2.6 interBalises.6 Ucan.6 | length 16.7
  1-TOP w0.508: Ucan.6 38.1,30.353 CAN.1@40.132,32.385
  2-Signal w0.508: interBalises2.6@31.115,36.449 32.207,35.357 33.731,35.357 34.29,34.798 38.481,34.798 CAN.1@40.386,32.893
  4-BOT w1.27: interBalises2.6 interBalises.6@31.115,38.735
GND: ALIM2.2 CAN.3 Cdcan1.1 Cdcan2.1 Cdpic1.2 Cdpic2.2 Cdpic3.2 Cdpic4.2 Cin2.1 Cin.1 Cmclr.1 Cout2.1 Cout.1 Cq1.2 Cq2.2 Csynchro.2 CtempOut.1 Cu1rx.1 D1.2 D2.2 D3.2 D4.2 ICSP.3 interBalises2.9 interBalises.9 S2.1 SW1.1 SYNCHRO.1 UART.4 Ucan.2 Ucan.8 Upic.11 Upic.31 Upic.51 Upic.70 Ureg.4 Vis1.1 Vis2.1 | length 22.1
  1-TOP w0.635: Ucan.8 35.56,27.813 36.449,26.924 37.211,26.924 ; Cdcan2.1 36.83,22.44 Ucan.2@36.83,23.876 ; Ucan.2@36.83,25.019 Ucan.2 36.83,26.543 37.211,26.924 ; Cdcan1.1@41.021,26.289 40.386,26.924 37.211,26.924
  4-BOT w0.305: v1(34.544,12.954) 34.615,12.883 Upic.51
  4-BOT w0.406: Cdpic3.2@18.249,12.612 Cdpic3.2@18.288,12.573 ; Cdpic3.2@18.669,12.827 19.375,13.533 Upic.11
  4-BOT w1.27: interBalises2.9@38.735,36.449 interBalises.9@38.735,38.608 ; Cu1rx.1@44.069,18.288 47.548,18.288 UART.4
  other v1: 28.702,2.413 20.168,3.302 36.805,3.302 29.083,3.81 36.322,5.08 18.669,6.096 44.323,6.985 8.255,8.128 23.241,8.255 15.748,8.763 13.081,9.779 32.639,11.049 30.734,12.192 32.893,12.319 17.78,12.573 6.985,12.827 50.267,12.954 32.004,13.335 49.403,14.732 43.18,15.367 45.72,15.621 14.351,16.002 32.639,16.256 27.178,16.891 30.734,17.907 24.003,18.415 53.95,20.193 3.15,20.32 4.674,21.209 28.448,22.352 19.177,22.86 4.445,25.4 46.355,25.908 46.355,26.924 47.879,28.321 49.149,28.321 50.419,28.321 51.689,28.321 2.261,28.575 55.093,28.575 48.514,29.464 49.784,29.464 51.054,29.464 52.324,29.464 17.272,29.845 4.318,30.226 47.879,30.607 49.149,30.607 50.419,30.607 51.689,30.607 48.514,31.75 49.784,31.75 51.054,31.75 52.324,31.75 47.879,32.766 49.149,32.766 50.419,32.766 51.689,32.766 4.826,36.576 3.15,36.83 54.077,36.83 50.013,44.196 44.298,50.165 36.932,53.975 20.168,54.102 28.55,55.245
LED1: Rled1.2 Upic.54 | length 10.1
  4-BOT w0.406: Upic.54 37.581,10.933 38.354,10.16 44.704,10.16 Rled1.2@45.466,10.922
LED2: Rled2.2 Upic.55 | length 8.1
  4-BOT w0.406: Upic.55 37.215,10.283 38.354,9.144 43.053,9.144 Rled2.2@43.434,8.763
LED3: Rled3.2 Upic.56 | length 7.5
  1-TOP w1.27: Rled3.2 38.608,9.144 v1@39.497,8.255
  4-BOT w0.305: Upic.56 37.103,9.633 38.354,8.382 v1@39.116,8.382
  other v1: 39.37,8.128
LED4: Rled4.2 Upic.57 | length 3.6
  4-BOT w0.305: Upic.57 36.991,8.983 37.719,8.255 v1@37.719,6.731
  other v1: 37.973,6.858
LED5: Upic.64
LED6: Upic.65
MCLR: ICSP.1 RresetICD.1 Upic.9 | length 24.3
  1-TOP w1.27: ICSP.1@6.604,24.384 6.858,24.638 RresetICD.1
  2-Signal w0.508: ICSP.1@6.604,24.384 8.001,24.384 15.621,16.764 15.621,12.573 17.145,11.049 v1(18.161,11.049)
  4-BOT w0.406: v1@18.288,11.303 18.796,11.303 19.726,12.233 Upic.9
MV: Amp.1 Amp.2 CdMv.2 jump.1 PGA.4 Ramp5mv.2 Rdif+mv.1 Rred.2 | length 36.2
  2-Signal w0.635: v1(21.082,45.847) 22.86,44.069 31.75,44.069 ; v1@29.083,41.402 31.75,44.069 ; v1(31.496,52.07) 35.56,48.006 v1(35.56,44.069) 31.75,44.069
  4-BOT w0.305: v1@20.955,45.974 20.955,46.863 21.217,47.125 PGA.4
  4-BOT w0.635: jump.1@18.542,45.681 20.916,45.681 v1@20.955,45.847
  4-BOT w1.27: 34.036,44.45 34.036,45.593 ; Amp.1 Rred.2@35.801,44.971 ; Rred.2@36.031,44.741 Rred.2@36.131,44.64
  other v1: 29.083,41.021
NetAmp_3: Amp.3 Rmv1.1 Rmv2.2 | length 5.4
  4-BOT w0.635: Amp.3 32.131,43.815 33.909,42.037 Rmv1.1@33.909,41.91
  4-BOT w1.27: Rmv1.1 Rmv2.2@35.56,41.656
NetAmp_5: Amp.5 Rdif+a.1 Rdif+mv.2 | length 8.5
  4-BOT w0.508: Rdif+a.1@22.987,41.402 26.797,41.402 29.591,44.196 Amp.5
NetAmp_6: Amp.6 Rdif-a.1 Rdif-out.2 | length 6.2
  4-BOT w0.508: Rdif-out.2@25.527,43.18 27.432,43.18 28.321,44.069 Amp.6
  4-BOT w0.635: Rdif-a.1@23.167,43.508 Rdif-out.2 ; Rdif-out.2@25.4,43.307 Rdif-out.2@25.527,43.18
NetAmp_7: Amp.7 Amp.10 PGA.3 Rdif-out.1 | length 10.6
  4-BOT w0.305: PGA.3 23.749,47.625 Rdif-out.1@24.638,46.736
  4-BOT w0.508: Rdif-out.1@25.527,46.355 26.543,47.371 28.321,47.371 29.591,48.641 Amp.10 ; Rdif-out.1@25.667,46.355 Amp.7
NetAmp_8: Amp.8 PGA.2 Ramp5out.1 | length 4.4
  4-BOT w0.305: PGA.2 23.487,48.125 Ramp5out.1@24.638,49.276
  4-BOT w0.508: Ramp5out.1@25.273,49.657 25.387,49.771 Amp.8
NetAmp_9: Amp.9 Ramp5mv.1 Ramp5out.2 | length 5.8
  4-BOT w0.508: Ramp5out.2@25.146,52.197 28.194,52.197 28.321,52.324 Amp.9
NetAmp_12: Amp.12 PGA.5 | length 11.3
  2-Signal w0.635: v1(23.114,45.847) 24.511,47.244 31.496,47.244 32.131,47.879 32.131,48.26
  4-BOT w0.305: PGA.5 23.148,45.974 v1@23.241,45.974
  other v1: 32.131,48.768
NetAmp_13: Amp.13 Dred.3 Rfil.1 Rred.1 | length 48.6
  2-Signal w0.635: v1@28.448,18.669 28.448,19.304 34.798,25.654 37.719,25.654 43.815,31.75 43.815,35.941 36.957,42.799 36.957,47.752 v1@36.576,48.133
  4-BOT w0.508: Amp.13 33.401,48.514 34.036,47.879 36.449,47.879 Rred.1@36.756,48.186 ; Rred.1 Rred.1@36.756,48.186 ; Dred.3@37.719,50.673 37.719,49.149 Rred.1@36.756,48.186
  other v1: 28.575,18.796 36.703,48.26
NetAmp_14: Amp.14 Dred.1 | length 1.4
  4-BOT w0.508: Amp.14@34.798,49.911 34.859,49.85 Dred.1
NetCmclr_2: Cmclr.2 Rmclr.1 RresetICD.2 SW1.3 | length 6
  1-TOP w1.27: RresetICD.2 9.753,29.136 10.453,29.835 10.453,28.409 SW1.3@10.922,27.94
NetCq1_1: Cq1.1 Q.2 Upic.50 | length 5.7
  4-BOT w0.406: Upic.50 37.394,13.533 38.608,12.319 38.608,11.811 Q.2@38.862,11.557
  4-BOT w1.016: Q.2@38.862,11.557 40.386,11.557 Cq1.1@40.513,11.43
NetCq2_1: Cq2.1 Q.1 Upic.49 | length 5.5
  4-BOT w0.406: Upic.49 37.043,14.183 38.481,15.621 Q.1@38.481,16.637
  4-BOT w1.016: Q.1@38.481,16.637 Cq2.1@39.878,16.637
NetD1_1: D1.1 Rled1.1 | length 0
  1-TOP w0.635: D1.1 45.737,13.445 D1.1@45.72,13.462
  other v1: 45.72,13.589
NetD2_1: D2.1 Rled2.1
  other v1: 43.18,12.319
NetD3_1: D3.1 Rled3.1 | length 1.9
  1-TOP w1.27: D3.1@31.403,9.398 Rled3.1@33.274,9.398
NetD4_1: D4.1 Rled4.1 | length 2
  1-TOP w1.27: D4.1 Rled4.1@35.052,7.112
NetRt1_1: Rt1.1 Rt20.2 T1.2 T20.1 | length 7
  1-TOP w2.54: T20.1 23.233,2.032 T1.2@26.035,2.032
  4-BOT w1.27: Rt20.2 21.191,1.125 T20.1@22.606,2.54 ; T1.2@26.289,1.471 Rt1.1
NetRt1_2: Rt1.2 Rt2.1 T1.1 T2.2 | length 6.1
  1-TOP w2.54: T1.1 33.909,2.032 T2.2@34.417,2.54
  4-BOT w1.27: Rt1.2 T1.1@30.152,1.196 ; T2.2@34.671,2.54 35.881,1.33 Rt2.1
NetRt2_2: Rt2.2 Rt3.1 T2.1 T3.2 | length 7.6
  1-TOP w2.54: T2.1 40.657,4.081 T3.2@42.164,5.588
  4-BOT w1.27: Rt2.2 38.717,3.411 T2.1@39.116,3.81 ; T3.2@42.164,5.588 42.762,4.99 Rt3.1
NetRt3_2: Rt3.2 Rt4.1 T3.1 T4.2 | length 6.9
  1-TOP w2.54: T3.1 T4.2 48.641,11.043 T4.2@48.641,11.049
  4-BOT w1.27: T3.1@46.228,8.382 46.385,8.225 Rt3.2 ; T4.2@48.895,10.922 49.052,10.765 Rt4.1
NetRt4_2: Rt4.2 Rt5.1 T4.1 T5.2 | length 7.1
  1-TOP w2.54: T4.1 53.086,16.567 T5.2@53.086,18.034
  4-BOT w1.27: T4.1@51.816,14.732 52.16,14.388 Rt4.2 ; T5.2@53.467,18.161 53.739,18.433 Rt5.1
NetRt5_2: Rt5.2 Rt6.1 T5.1 T6.2 | length 7.3
  1-TOP w2.54: T5.1 55.118,23.233 T6.2 T6.2@55.118,26.162
  4-BOT w1.27: T5.1@54.864,22.479 55.82,21.523 Rt5.2 ; T6.2@55.499,26.289 55.679,26.289 Rt6.1
NetRt6_2: Rt6.2 Rt7.1 T6.1 T7.2 | length 7.3
  1-TOP w2.54: T7.2@54.61,34.417 55.118,33.909 T6.1
  4-BOT w1.27: T7.2@54.864,34.798 55.82,35.754 Rt7.1 ; T6.1 56.234,31.015 Rt6.2@56.642,30.607 ; Rt6.2 Rt6.2@56.896,30.607
NetRt7_2: Rt7.2 Rt8.1 T7.1 T8.2 | length 7.5
  1-TOP w2.54: T8.2@51.562,42.164 53.069,40.657 T7.1
  4-BOT w1.27: T8.2@51.562,42.164 52.16,42.762 Rt8.1 ; T7.1@53.34,39.243 53.612,38.971 Rt7.2
NetRt8_2: Rt8.2 Rt9.1 T8.1 T9.2 | length 7
  1-TOP w2.54: T9.2@46.228,48.641 46.228,48.52 T8.1
  4-BOT w1.27: Rt9.1 46.131,48.992 T9.2@46.228,48.895 ; T8.1@48.768,46.355 48.798,46.385 Rt8.2
NetRt9_2: Rt9.2 Rt10.1 T9.1 T10.2 | length 7
  1-TOP w2.54: T10.2@39.116,53.086 40.583,53.086 T9.1
  4-BOT w0.635: T10.2@40.005,53.467 T10.2@40.185,53.287
  4-BOT w1.27: Rt10.1 38.717,53.612 T10.2@38.862,53.467 ; T9.1@42.545,51.816 43.143,52.414 Rt9.2
NetRt10_2: Rt10.2 Rt11.1 T10.1 T11.2 | length 6.9
  1-TOP w2.54: T11.2@30.988,55.118 31.529,54.577 T10.1
  4-BOT w1.27: Rt11.1 30.152,56.081 T11.2@30.988,55.245 ; T10.1@34.798,54.991 35.627,55.82 Rt10.2
NetRt11_2: Rt11.2 Rt12.1 T11.1 T12.2 | length 7.1
  1-TOP w2.54: T12.2@22.733,54.737 23.114,55.118 T11.1
  4-BOT w1.27: Rt12.1 21.396,55.82 T12.2@22.479,54.737 ; T11.1@26.289,55.245 27.252,56.208 Rt11.2
NetRt12_2: Rt12.2 Rt13.1 T12.1 T13.2 | length 7.1
  1-TOP w2.54: T13.2@14.986,51.435 16.62,53.069 T12.1
  4-BOT w1.27: Rt13.1 13.372,52.414 T13.2@14.351,51.435 ; T12.1@18.161,53.34 18.433,53.612 Rt12.2
NetRt14_2: Rt14.2 Rt15.1 T14.1 T15.2 | length 7.4
  1-TOP w2.54: T15.2@4.064,39.116 4.064,40.583 T14.1
  4-BOT w1.27: Rt15.1 3.538,38.717 T15.2@3.937,39.116 ; Rt14.2 4.736,42.635 T14.1@5.207,42.164
NetRt15_2: Rt15.2 Rt16.1 T15.1 T16.2 | length 7.1
  1-TOP w2.54: T16.2@2.032,30.988 T16.2 2.032,33.917 T15.1
  4-BOT w1.27: Rt16.1 1.196,30.406 T16.2@1.524,30.734 ; Rt15.2 1.33,35.373 T15.1@2.159,34.544
NetRt16_2: Rt16.2 Rt17.1 T16.1 T17.2 | length 7.4
  1-TOP w2.54: T16.1 2.032,23.241 T17.2@2.54,22.733
  4-BOT w1.27: Rt16.2 0.434,27.506 T16.1@1.651,26.289 ; Rt17.1 1.33,21.269 T17.2@2.413,22.352
NetRt17_2: Rt17.2 Rt18.1 T17.1 T18.2 | length 7.3
  1-TOP w2.54: T17.1 4.081,16.62 T18.2@5.715,14.986
  4-BOT w1.27: Rt17.2 3.284,18.433 T17.1@3.683,18.034 ; Rt18.1 4.99,14.515 T18.2@5.334,14.859
NetRt18_2: Rt18.2 Rt19.1 T18.1 T19.2 | length 6.6
  1-TOP w2.54: T18.1 10.916,8.636 T19.2@11.049,8.636
  4-BOT w1.27: Rt18.2 8.225,10.765 T18.1@8.255,10.795 ; Rt19.1 11.019,7.971 T19.2@11.049,8.001
NetRt19_2: Rt19.2 Rt20.1 T19.1 T20.2 | length 7.1
  1-TOP w2.54: T19.1 16.567,4.064 T20.2@18.034,4.064
  4-BOT w1.27: Rt19.2 14.388,4.736 T19.1@14.859,5.207 ; Rt20.1 T20.2@18.433,3.665
NetRtemp_2: Rtemp.2 Utemp.3 | length 0.8
  1-TOP w0.305: Rtemp.2@14.732,34.544 15.225,34.051 Utemp.3
PAN2: Upic.18
PAN3: CtempOut.2 Rtemp.1 Upic.17 | length 24.6
  2-Signal w0.508: v1@10.414,34.671 9.271,33.528 9.271,26.543 10.795,25.019 10.795,24.384 18.415,16.764 v1(18.796,16.764)
  4-BOT w0.406: CtempOut.2@18.669,17.433 Upic.17
  other v1: 10.541,34.417
PAN4_QEA: Upic.16
PAN5_QEB: Upic.15
PAN8: Cfil.2 Rfil.2 Upic.27 | length 4.7
  1-TOP w0.635: Rfil.2@25.654,19.177 26.504,20.027 Cfil.2
  4-BOT w0.406: Upic.27@26.035,21.082 v1@26.035,22.479
  other v1: 26.289,22.606
PAN9: Upic.28
PAN10: Upic.29
PAN11: Upic.30
PAN12: Upic.33
PAN13: Upic.34
PAN14: Upic.35
PAN15: Upic.36
PBT1: Upic.13
PGC: ICSP.5 Upic.19 | length 10.7
  4-BOT w0.406: ICSP.5@11.303,15.494 14.542,18.733 Upic.19
PGD: ICSP.4 Upic.20 | length 10.7
  4-BOT w0.305: ICSP.4@10.668,17.653 12.398,19.383 Upic.20
PRA14_INT3: Upic.52
PRA15_INT4: Upic.53
PRD0: Upic.58
PRE9_INT2: Csynchro.1 Rsynchro.2 Upic.14 | length 25.4
  1-TOP w0.406: Rsynchro.2@20.447,33.655 20.32,33.528 20.32,17.653 v1(22.352,15.621)
  4-BOT w0.406: Csynchro.1@16.129,14.605 17.007,15.483 Upic.14 22.087,15.483 v1@22.225,15.621
PU2TX: interBalises2.1 interBalises.1 Upic.40 | length 34.9
  2-Signal w0.508: interBalises2.1 20.32,34.671 31.242,34.671 31.623,34.29 v1@32.893,34.29
  4-BOT w0.305: v1(33.147,34.163) 36.068,34.163 36.576,33.655 36.576,31.242 35.306,29.972 35.306,25.146 34.496,24.336 Upic.40
  4-BOT w1.27: interBalises2.1@18.288,36.576 interBalises.1@18.288,38.735
PWM1H: Upic.77
PWM1L: Upic.76
PWM2H: Upic.79
RE2: Upic.78
RG2_SCL: Upic.47
RG3_SDA: Upic.46
RG6_SCK2: PGA.7 Upic.6 | length 45.5
  2-Signal w0.406: v1@16.383,46.101 16.002,45.72 16.002,24.524 18.682,21.844 18.923,21.844 24.638,16.129 24.638,11.43 22.86,9.652 v1(22.606,9.652)
  4-BOT w0.305: v1@16.637,46.609 17.153,47.125 PGA.7
  4-BOT w0.406: Upic.6 21.594,10.283 22.225,9.652 v1(22.606,9.652)
  other v1: 16.637,46.228
RG7_SDI2: Upic.7
RG8_SDO2: PGA.8 Upic.8 | length 45.3
  2-Signal w0.406: v1@15.494,46.99 15.113,46.609 15.113,24.384 23.749,15.748 23.749,11.684 22.987,10.922 v1(22.606,10.922)
  4-BOT w0.305: v1@16.002,47.117 16.51,47.625 PGA.8
  4-BOT w0.406: Upic.8 21.945,11.583 v1(22.606,10.922)
  other v1: 15.621,46.99
RG9_SS2: PGA.9 Upic.10 | length 43.6
  2-Signal w0.406: v1@15.367,48.26 14.224,47.117 14.224,23.495 18.047,19.672 18.047,19.545 20.574,17.018 20.574,15.494 20.574,14.351 22.225,12.7 v1@22.606,12.7
  4-BOT w0.305: v1@15.756,48.125 PGA.9
  4-BOT w0.406: Upic.10 v1@21.9,12.883
  other v1: 22.352,12.827 15.494,48.26
SYNCHRO: interBalises2.3 interBalises.3 Rsynchro.1 SYNCHRO.2 | length 8.4
  1-TOP w1.27: SYNCHRO.2 23.495,33.147 Rsynchro.1@23.495,34.036 ; Rsynchro.1@23.495,33.909 Rsynchro.1@23.495,34.036 ; interBalises.3@23.495,38.735 interBalises2.3 23.495,34.163 Rsynchro.1@23.495,34.036
U1RX: Cu1rx.2 Rsu1rx.2 Ru1rx.1 Upic.42 | length 8.3
  4-BOT w0.406: Upic.42 39.18,18.733 Rsu1rx.2@40.576,20.13 ; Rsu1rx.2@40.957,20.511 Rsu1rx.2@41.275,20.828
  4-BOT w1.27: Rsu1rx.2@41.021,20.447 41.021,19.597 Cu1rx.2
  other v1: 41.529,18.796
U1RX_C: interBalises2.5 interBalises.5 Rsu1rx.1 UART.3 | length 35.4
  4-BOT w0.305: interBalises2.5 30.099,35.052 40.767,35.052 42.545,33.274 42.545,25.019 43.688,23.876 43.688,20.754 Rsu1rx.1
  4-BOT w1.27: interBalises2.5@28.575,36.449 interBalises.5@28.575,38.608 ; Rsu1rx.1@43.942,20.32 UART.3@48.641,20.32
U1TX: Rsu1tx.2 Upic.41 | length 7.6
  4-BOT w0.406: Upic.41 37.417,19.383 40.894,22.86 Rsu1tx.2@42.164,22.86
U1TX_C: interBalises2.4 interBalises.4 Rsu1tx.1 Ru1tx.1 UART.2 | length 38.8
  2-Signal w0.305: interBalises2.4@26.162,36.957 26.162,38.354 26.797,37.719 39.878,37.719 v1@40.894,36.703
  4-BOT w0.305: v1(40.767,36.703) 41.91,35.56 41.91,34.798 43.307,33.401 43.307,25.781 45.138,23.95 Rsu1tx.1
  4-BOT w1.27: interBalises2.4 26.035,37.592 interBalises.4@26.035,38.735 ; Rsu1tx.1 UART.2@49.276,22.86
  other v1: 45.085,22.987
U2RX: interBalises2.2 interBalises.2 Upic.39 | length 28.6
  4-BOT w0.305: interBalises2.2@20.955,36.322 22.842,34.435 31.478,34.435 33.909,32.004 33.909,31.242 34.544,30.607 34.544,25.4 33.846,24.702 Upic.39
  4-BOT w1.27: interBalises2.2 interBalises.2@20.955,38.735
US+: Rdif+a.2 Rt14.1 T14.2 | length 15.1
  4-BOT w1.27: Rt14.1 T14.2@8.412,46.131 ; T14.2@8.699,46.038 13.335,41.402 14.351,41.402 Rdif+a.2@19.886,41.402
US-: jump.2 Rdif-a.2 Rt13.2 T13.1 | length 13
  4-BOT w1.27: T13.1@10.765,48.925 Rt13.2 ; T13.1@11.049,48.768 11.049,48.133 15.24,43.942 Rdif-a.2@19.939,43.942
VCC: ALIM2.1 Cin2.2 Cin.2 interBalises2.8 interBalises.8 Ureg.1 | length 21.4
  1-TOP w1.27: ALIM2.1@40.386,41.91 38.608,41.91 36.195,39.497 interBalises2.8 37.973,34.798 42.164,34.798 42.799,34.163 Ureg.1@42.799,32.893 ; Cin2.2@42.545,36.957 42.545,34.999 Cin.2
  4-BOT w1.27: interBalises2.8 interBalises.8@36.195,38.735
VDD: Cdcan1.2 Cdcan2.2 Cdpic1.1 Cdpic2.1 Cdpic3.1 Cdpic4.1 Cout2.2 Cout.2 ICSP.2 PGA.10 Rmclr.2 Ru1rx.2 Ru1tx.2 S1.1 UART.1 Ucan.3 Upic.12 Upic.32 Upic.48 Upic.71 Ureg.3 | length 132.5
  1-TOP w0.406: Cdpic4.1@29.845,21.336 v1(29.845,22.479)
  1-TOP w0.635: Ucan.3 38.1,22.86 38.354,22.606 38.481,22.733 40.513,22.733 Cdcan1.2@40.894,23.114 ; Cout.2@43.434,25.527 44.45,24.511 46.355,24.511 47.117,23.749 ; Ru1tx.2@45.339,20.193 47.117,21.971 47.117,23.749 ; UART.1 48.514,25.146 47.117,23.749
  1-TOP w1.27: ICSP.2@7.62,21.844 7.622,21.844 12.312,21.968 ; v1(13.335,32.385) 13.388,32.332 Rmclr.2 ; Rmclr.2@13.716,29.591 12.954,28.829 12.954,22.606 12.319,21.971 12.319,20.32 v1(18.288,14.351) ; v1@18.415,14.478 18.669,14.224 30.48,14.224 24.892,8.636 24.892,6.35 26.543,4.699 27.051,4.699 Cdpic2.1@27.686,4.064 ; Cdpic4.1@30.099,20.574 30.099,21.463 34.417,17.145 Cdpic1.1@34.417,14.732 ; 30.353,14.224 30.861,14.732 Cdpic1.1@34.671,14.732 ; 34.417,17.653 35.56,18.796 38.354,18.796 43.307,23.749 Ureg.3@43.307,28.067 ; Cout2.2 43.014,28.36 Ureg.3@43.053,28.321 ; Ru1rx.2 44.63,19.738 Ru1tx.2@44.958,20.066
  2-Signal w0.508: v1@13.335,32.639 13.335,48.133 14.605,49.403 v1@15.875,49.403
  4-BOT w0.305: v1@16.256,49.276 16.907,48.625 PGA.10 ; v1(34.544,14.859) 34.57,14.833 Upic.48
  4-BOT w0.406: Cdpic3.1@18.202,14.183 Upic.12 ; v1@27.996,3.866 Upic.71 ; Upic.32 29.296,21.93 v1@29.718,22.352
  4-BOT w0.508: v1@27.813,3.683 v1@27.996,3.866
  4-BOT w0.635: UART.1@50.165,25.273 UART.1
  other v1: 27.813,3.81 16.129,49.403
VREF+: Cvref1.2 Cvref2.2 Rvref+.1 Upic.24 | length 12.8
  4-BOT w0.406: Cvref1.2@18.542,24.511 19.05,24.003 21.971,24.003 22.502,23.472 22.502,22.964 23.057,22.409 23.565,22.409 24.096,21.878 Upic.24
  4-BOT w1.27: Rvref+.1@14.351,25.273 15.367,24.257 Cvref1.2@18.796,24.257
VREF-: Rvref-.2 Upic.23 | length 7.2
  4-BOT w0.305: 20.828,20.701 22.225,19.304
  4-BOT w0.406: 20.828,20.701 Rvref-.2@20.828,23.114 ; 22.225,19.304 23.446,19.304 Upic.23
pads on no net: Dred.2 ICSP.6 SW1.2 SW1.4 Ucan.5 Upic.1 Upic.2 Upic.3 Upic.4 Upic.5 Upic.21 Upic.22 Upic.37 Upic.38 Upic.43 Upic.44 Upic.45 Upic.59 Upic.60 Upic.61 Upic.62 Upic.63 Upic.66 Upic.67 Upic.68 Upic.69 Upic.74 Upic.75 Upic.80 Utemp.1 Utemp.5
copper on no net: | length 889.3
  1-TOP w0.254: 33.96,28.575 ccw(c28.575,28.575) 33.96,28.575 ; 58.575,28.575 ccw(c28.575,28.575) 58.575,28.575
  2-Signal w0.254: 33.96,28.575 ccw(c28.575,28.575) 33.96,28.575 ; 58.575,28.575 ccw(c28.575,28.575) 58.575,28.575
  3-GND w0.254: 33.96,28.575 ccw(c28.575,28.575) 33.96,28.575 ; 58.575,28.575 ccw(c28.575,28.575) 58.575,28.575
  4-BOT w0.254: 33.96,28.575 ccw(c28.575,28.575) 33.96,28.575 ; 58.575,28.575 ccw(c28.575,28.575) 58.575,28.575

## Polygon pours and split planes (outlines as drawn)
GND on 3-GND "3-GND" (solid, remove dead copper, pour order 1005): -11.684,68.453 69.215,68.453 69.215,-12.065 -11.684,-12.065
AGND on 3-GND "3-AGND" (solid, remove dead copper, pour order 1001): 20.447,52.832 39.116,52.832 39.116,43.053 18.136,27.051 12.664,27.051 12.827,47.879
AGND on 4-BOT "4-AGND" (solid, remove dead copper, pour order 1001): 20.447,52.832 39.116,52.832 39.116,43.053 18.136,27.051 12.664,27.051 12.827,47.879
GND on 4-BOT "4-GND" (solid, remove dead copper, pour order 1002): -11.684,68.453 69.215,68.453 69.215,-12.065 -11.684,-12.065
GND on 2-Signal "2-GND" (solid, remove dead copper, pour order 1004): -11.684,68.453 69.215,68.453 69.215,-12.065 -11.684,-12.065
GND on 1-TOP "1-GND" (solid, remove dead copper, pour order 1003): -11.684,68.453 69.215,68.453 69.215,-12.065 -11.684,-12.065

## Keep-outs
Keep-Out Layer:
  lines w0.254: -1.425,28.575 ccw(c28.575,28.575) 28.575,-1.425 ccw(c28.575,28.575) 58.575,28.575 ccw(c28.575,28.575) 28.575,58.575 ccw(c28.575,28.575) -1.425,28.575 ; 23.419,27.991 23.419,28.321 23.444,28.346 23.47,29.261 23.597,29.896 23.724,30.353 24.054,30.861 24.054,31.039 24.257,31.42 24.536,31.801 24.638,31.902 24.663,31.902 24.994,32.309 25.273,32.537 25.654,32.817 25.959,32.995 26.289,33.172 26.568,33.299 27,33.426 27.407,33.528 27.915,33.604 28.219,33.655 28.245,33.63 28.778,33.68 29.464,33.63 29.616,33.553 29.997,33.477 30.251,33.401 30.582,33.223 30.836,33.122 31.064,32.969 31.318,32.842 31.623,32.639 31.877,32.385 31.953,32.385 31.953,32.36 32.385,31.928 32.385,31.902 32.741,31.547 32.842,31.344 33.122,30.963 33.249,30.531 33.477,30.099 33.579,29.591 33.579,29.337 33.68,28.55 33.579,27.762 33.553,27.432 33.452,26.924 33.223,26.365 32.969,25.933 32.563,25.298 32.258,25.019 32.233,24.943 31.547,24.384 31.09,24.105 30.607,23.851 29.947,23.622 29.54,23.495 28.981,23.393 28.575,23.419 28.042,23.47 27.254,23.597 26.949,23.724 26.391,23.851 26.06,24.054 25.679,24.257 25.375,24.486 25.324,24.486 24.968,24.841 25.019,24.841 24.486,25.375 24.46,25.375 24.46,25.4 24.308,25.705 24.181,25.857 24.003,26.162 23.851,26.467 23.749,26.822 23.597,27.153 23.495,27.584 23.419,27.991

## Other copper
1-TOP:
  pour cut-out: 35.115,22.733 35.115,30.861 39.814,30.861 39.814,30.226 35.75,30.226 35.75,22.733
4-BOT:
  pour cut-out: 36.767,19.431 20.13,19.431 20.13,20.193 36.767,20.193
  pour cut-out: 36.767,6.35 20.13,6.35 20.13,7.112 36.767,7.112
  pour cut-out: 33.909,4.889 33.909,21.526 35.433,21.526 35.433,4.889
  pour cut-out: 21.463,4.635 21.463,21.273 22.225,21.273 22.225,4.635

## Silkscreen, mask and mechanical layers (free items; w line width, h text height)
Top Overlay:
  circle w0.254: c28.575,28.575 r5.385
  text "#" at 11.887,45.161 h1.02 r270
  text "100k" at 13.36,44.374 h1.02
  text "*" at 11.836,43.713 h1.02 r270
  text "10k" at 13.36,42.951 h1.02
  text "x" at 11.989,42.342 h1.02 r270
  text "1k" at 13.335,41.478 h1.02
  text "=" at 12.649,40.818 h1.02 r180
  text "100R" at 13.284,39.878 h1.02
  text "o" at 16.129,36.195 h1.02
  text "t" at 15.494,35.306 h1.02
  text "#" at 12.141,34.874 h1.02 r270
  text "100n" at 18.669,34.417 h1.02 r270
  text "100n" at 5.969,32.131 h1.02
  text "*" at 11.455,30.251 h1.02 r270
  text "CAN" at 40.64,29.845 h1.02 r270
  text "=" at 6.299,28.143 h1.02 r270
  text "Tcan" at 34.163,23.495 h1.02 r90
  text "1u" at 33.655,22.987 h1.02 r90
  text "*" at 44.729,21.742 h1.02 r270
  text "100n" at 39.37,21.209 h1.02 r180
  text "100n" at 31.369,20.32 h1.02
  text "x" at 26.848,19.101 h1.02 r270
  text "*" at 42.697,18.567 h1.02 r270
  text "2012" at 21.463,16.764 h3.05 r90
  text "100n" at 34.798,16.002 h1.02 r90
  text "ROBOT ESEO" at 14.224,15.367 h3.05 r90
  text "RUN" at 48.133,12.7 h1.02 r90
  text "30F" at 29.21,11.811 h1.52 r90
  text "dsPIC" at 27.178,10.922 h1.52 r90
  text "uart" at 28.448,10.668 h1.02
  text "Recepteur Balise US" at 16.764,9.652 h3.05 r90
  text "x" at 34.214,9.449 h1.02 r270
  text "Nirgal" at 21.082,9.017 h3.05 r90
  text "CAN" at 43.688,8.89 h1.02 r90
  text "x" at 36.246,7.163 h1.02 r270
  text "100n" at 25.908,5.588 h1.02
  text "user" at 30.607,5.08 h1.02
Bottom Overlay:
  circle w0.254: c28.575,28.575 r5.385
  text "x" at 29.515,52.629 h1.02 r270
  text "*" at 24.663,45.364 h1.02 r270
  text "330k" at 37.846,45.212 h1.02 r270
  text "#" at 16.332,44.653 h1.02 r270
  text "100k" at 15.265,44.374 h1.02
  text "x" at 21.133,44.374 h1.02 r270
  text "MV" at 33.909,43.815 h1.02 r180
  text "*" at 16.281,43.205 h1.02 r270
  text "10k" at 15.265,42.951 h1.02
  text "#" at 31.953,41.986 h1.02 r270
  text "#" at 36.652,41.986 h1.02 r270
  text "x" at 21.26,41.961 h1.02 r270
  text "x" at 16.434,41.834 h1.02 r270
  text "*" at 27.457,41.808 h1.02 r270
  text "1k" at 15.24,41.478 h1.02
  text "8V" at 43.18,41.402 h1.52 r270
  text "=" at 16.256,40.894 h1.02 r180
  text "100R" at 15.189,39.878 h1.02
  text "RST" at 8.128,33.655 h1.02
  text "Synchro" at 25.146,33.147 h1.02
  text "100k" at 39.878,26.035 h1.02
  text "10" at 23.241,25.908 h1.02 r90
  text "10k" at 14.859,24.384 h1.02 r90
  text "1u" at 34.544,23.876 h1.02 r90
  text "100" at 44.577,23.876 h1.02
  text "10n" at 16.764,23.241 h1.02 r90
  text "100n" at 18.669,23.241 h1.02 r90
  text "10k" at 39.751,21.59 h1.02 r90
  text "100n" at 18.796,19.177 h1.02 r90
  text "dsPIC" at 28.956,17.653 h1.52 r90
  text "100p" at 41.656,16.891 h1.02 r180
  text "22p" at 38.862,15.494 h1.02 r90
  text "30F" at 27.051,15.113 h1.52 r90
  text "100" at 12.7,12.954 h1.02 r90
  text "x" at 45.39,12.751 h1.02 r270
  text "1n" at 15.748,11.557 h1.02 r180
  text "x" at 42.85,10.465 h1.02 r270
Mechanical 15:
  circle w0.254: c28.575,28.575 r7
Drill Drawing:
  circle w0.254: c28.575,28.575 r30
  circle w0.254: c28.575,28.575 r5.12

## Dimensions
28.575,28.575 to 29.437,29.437 on Mechanical 15
28.575,28.575 to 66.675,-6.731 on Mechanical 15
18.415,36.576 to -1.397,32.512 on Mechanical 15
48.575,38.575 to 28.575,-1.425 on Mechanical 15
48.575,38.575 to 28.575,28.575 on Mechanical 15
8.575,38.575 to 28.575,-1.425 on Mechanical 15
8.575,38.575 to -1.425,28.575 on Mechanical 15